# Altium PCB Base_PCB1.PcbDoc (part 1 of 2)
Units mm, origin at the board's own origin, x right, y up, seen from the top; angles counter-clockwise.
Board outline 100 x 100 mm, 4 copper layers (Top, Mid1, Mid2, Bottom), stack 1.746 mm thick; 70 components, 46 nets, 250 pads, 246 vias.
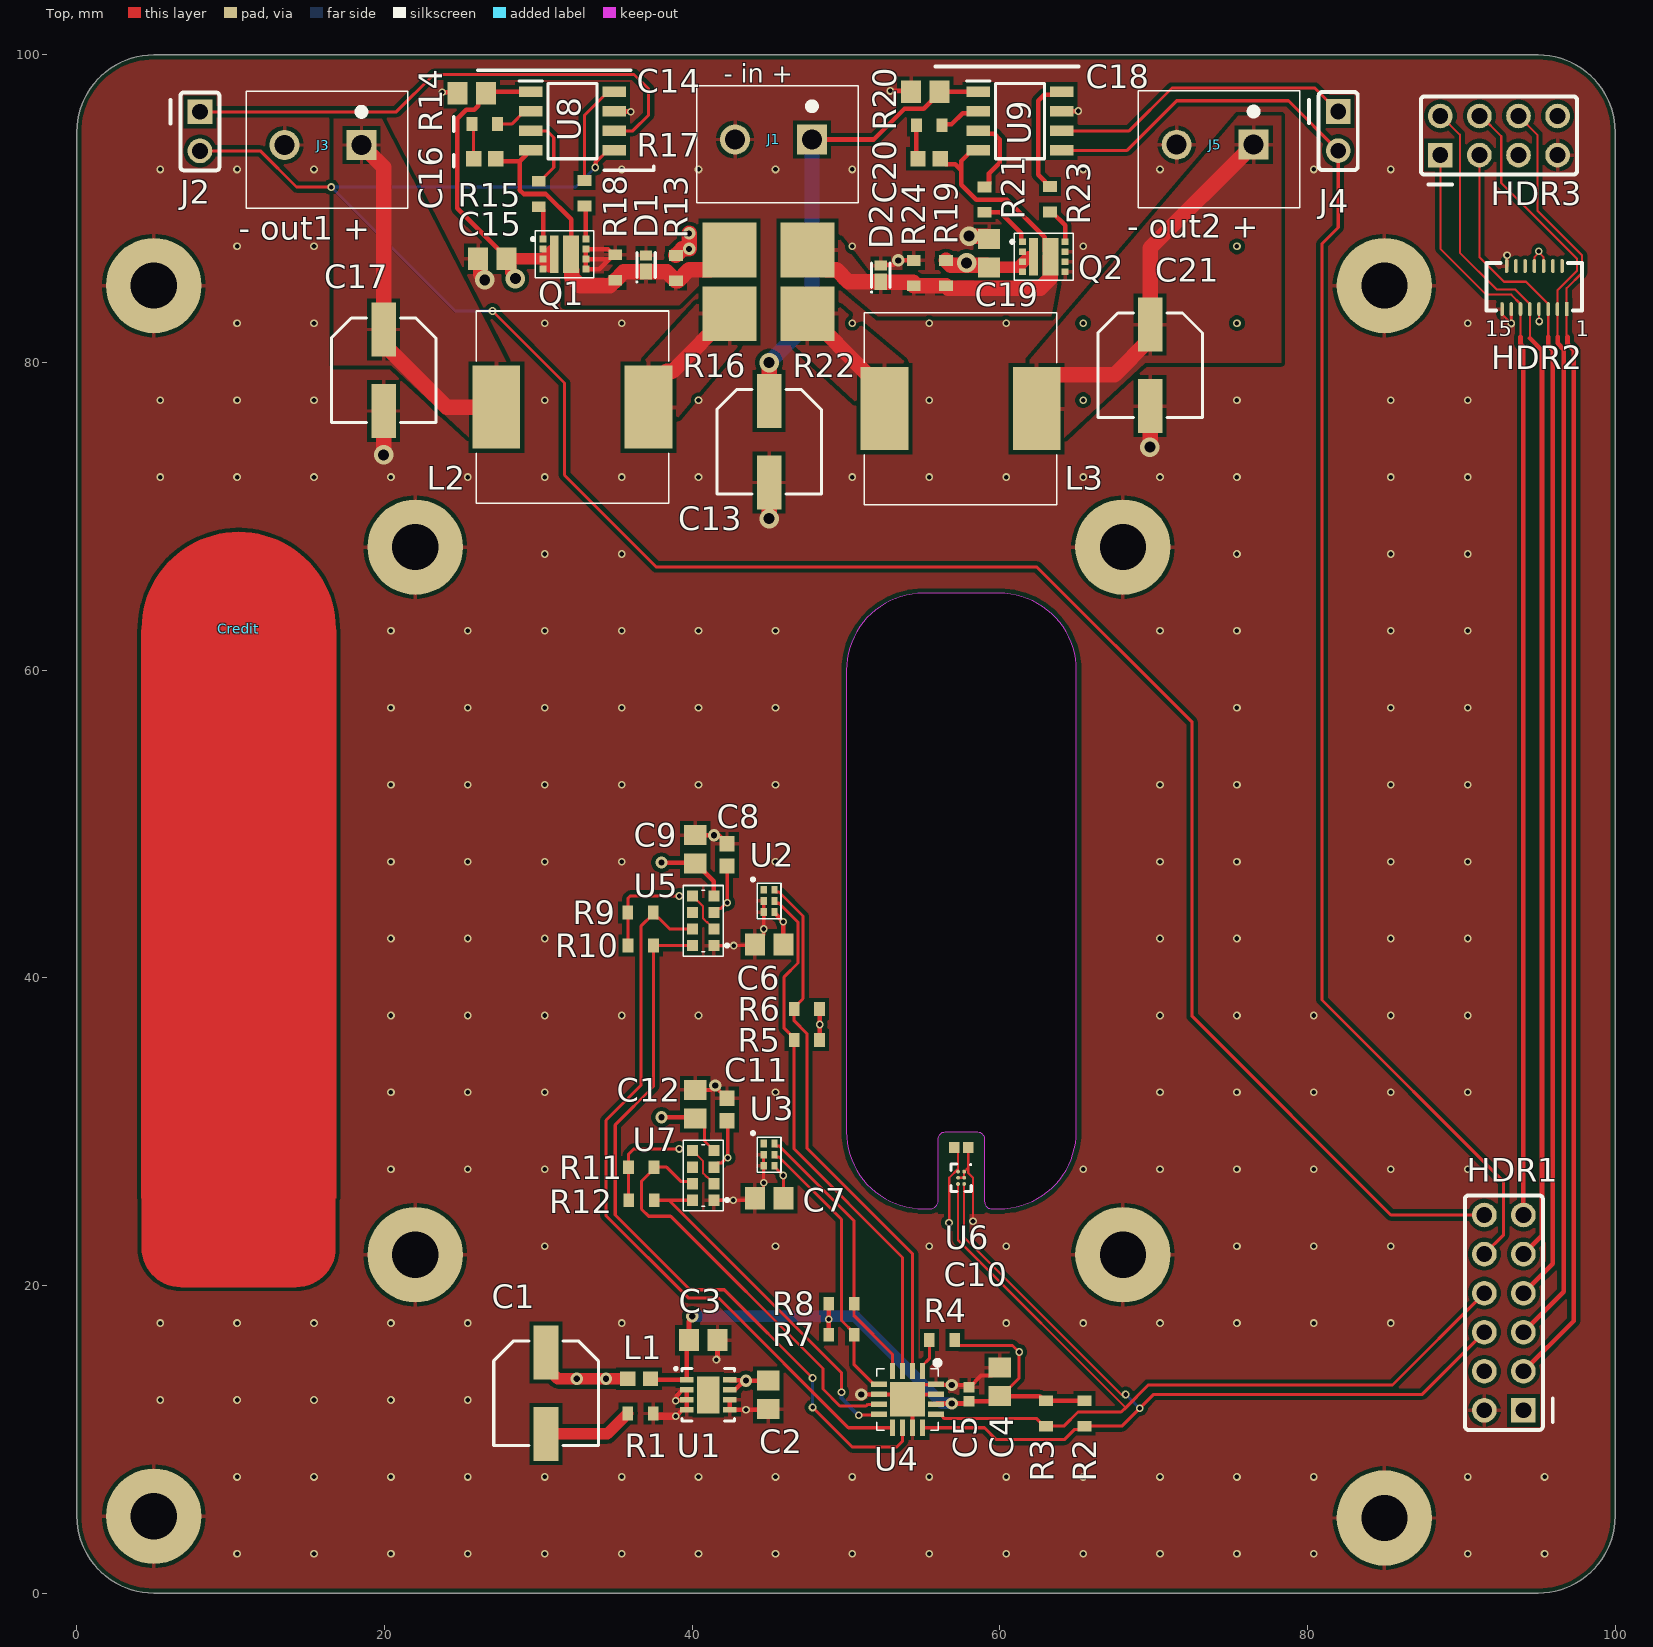
[diagram p0: Top view]
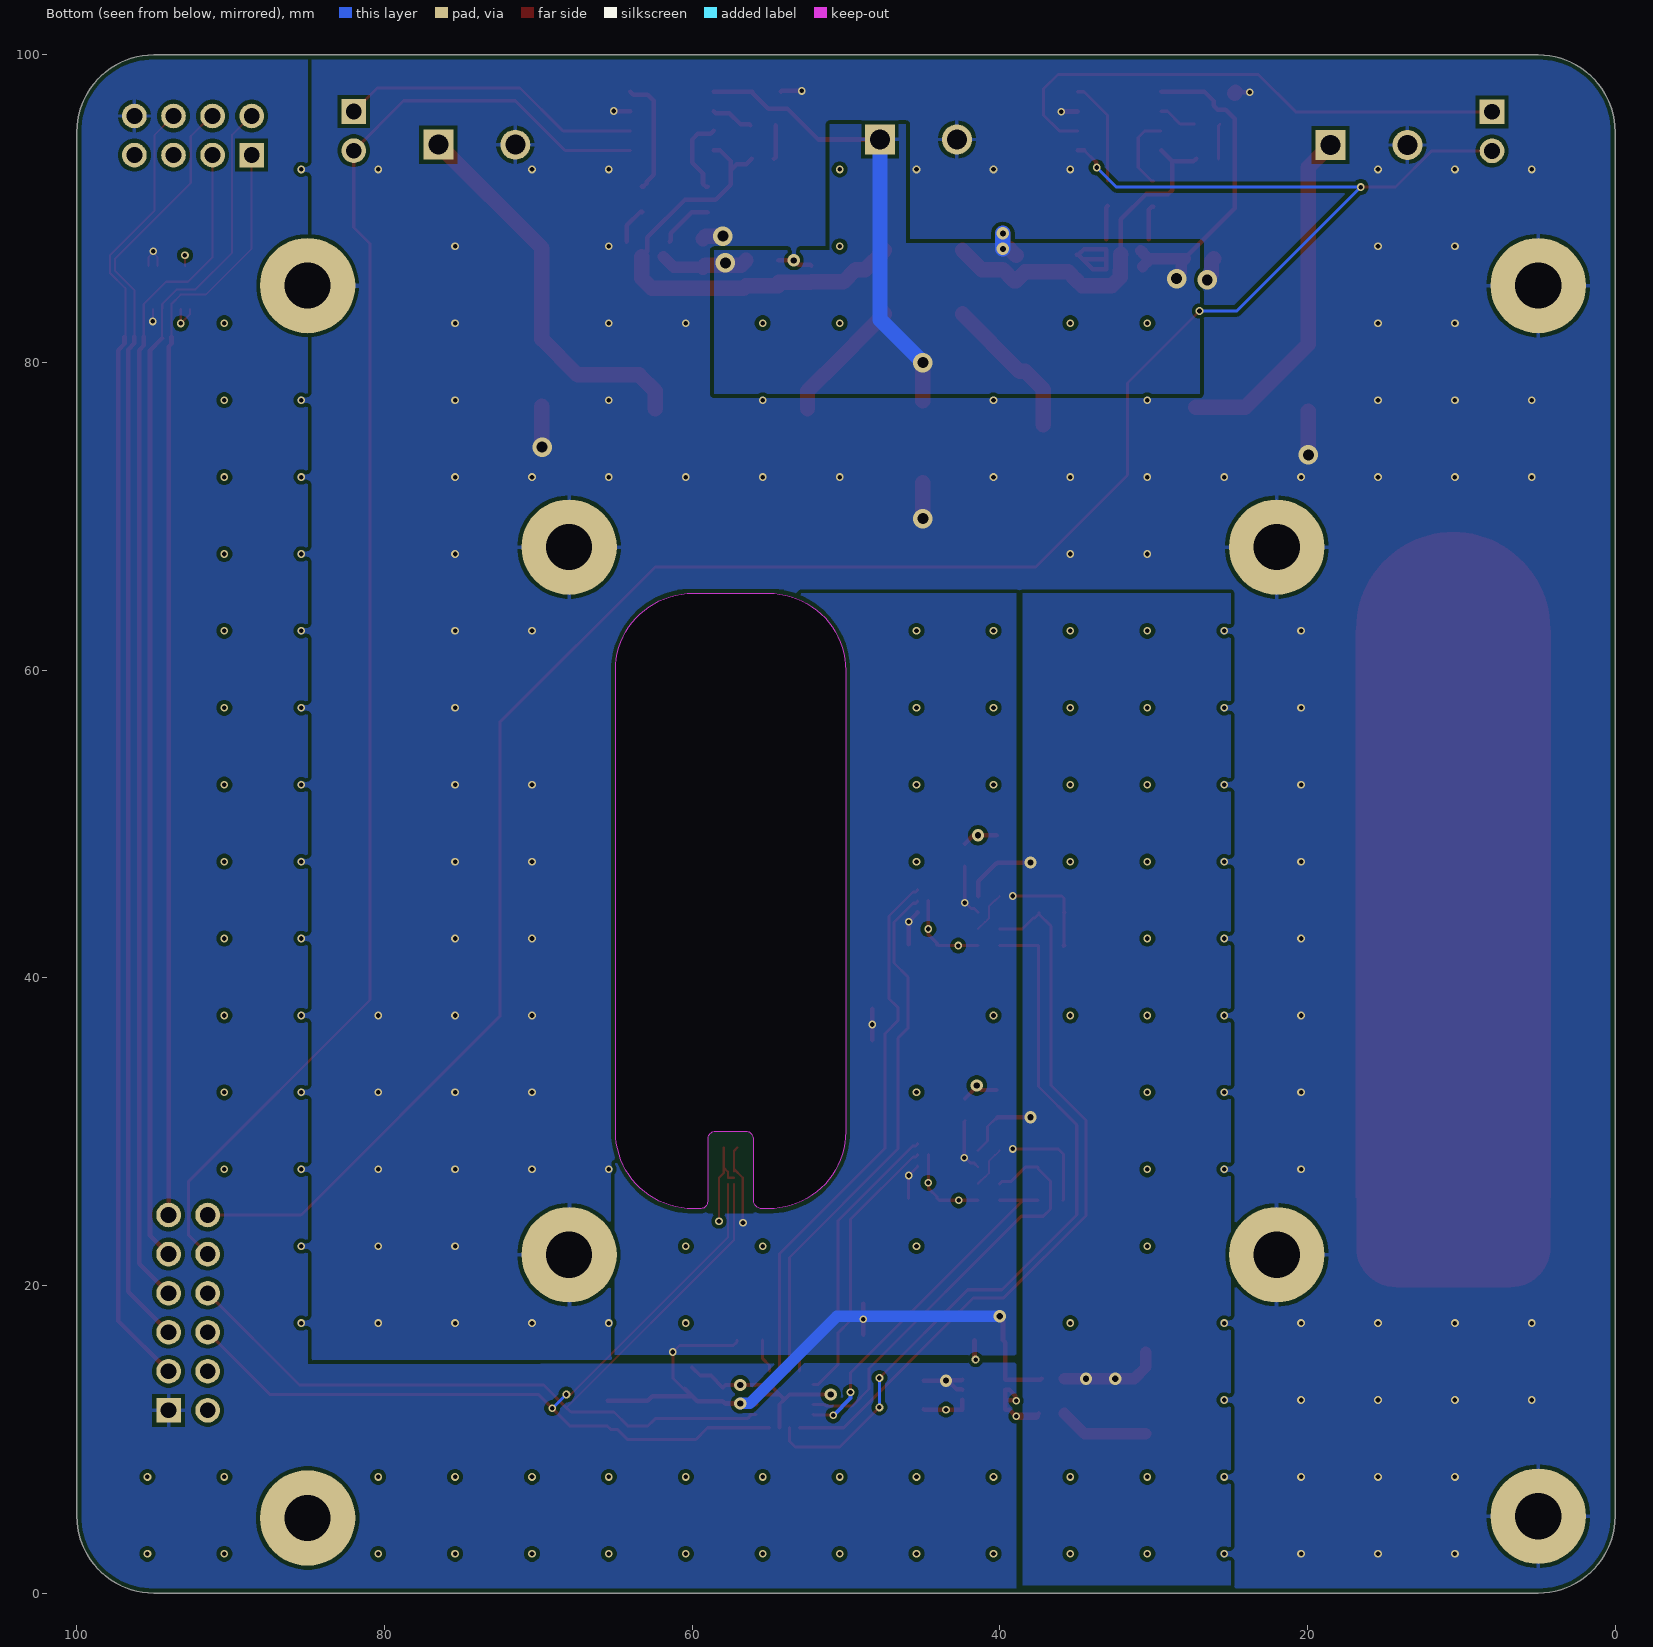
[diagram p1: Bottom view, seen from below]
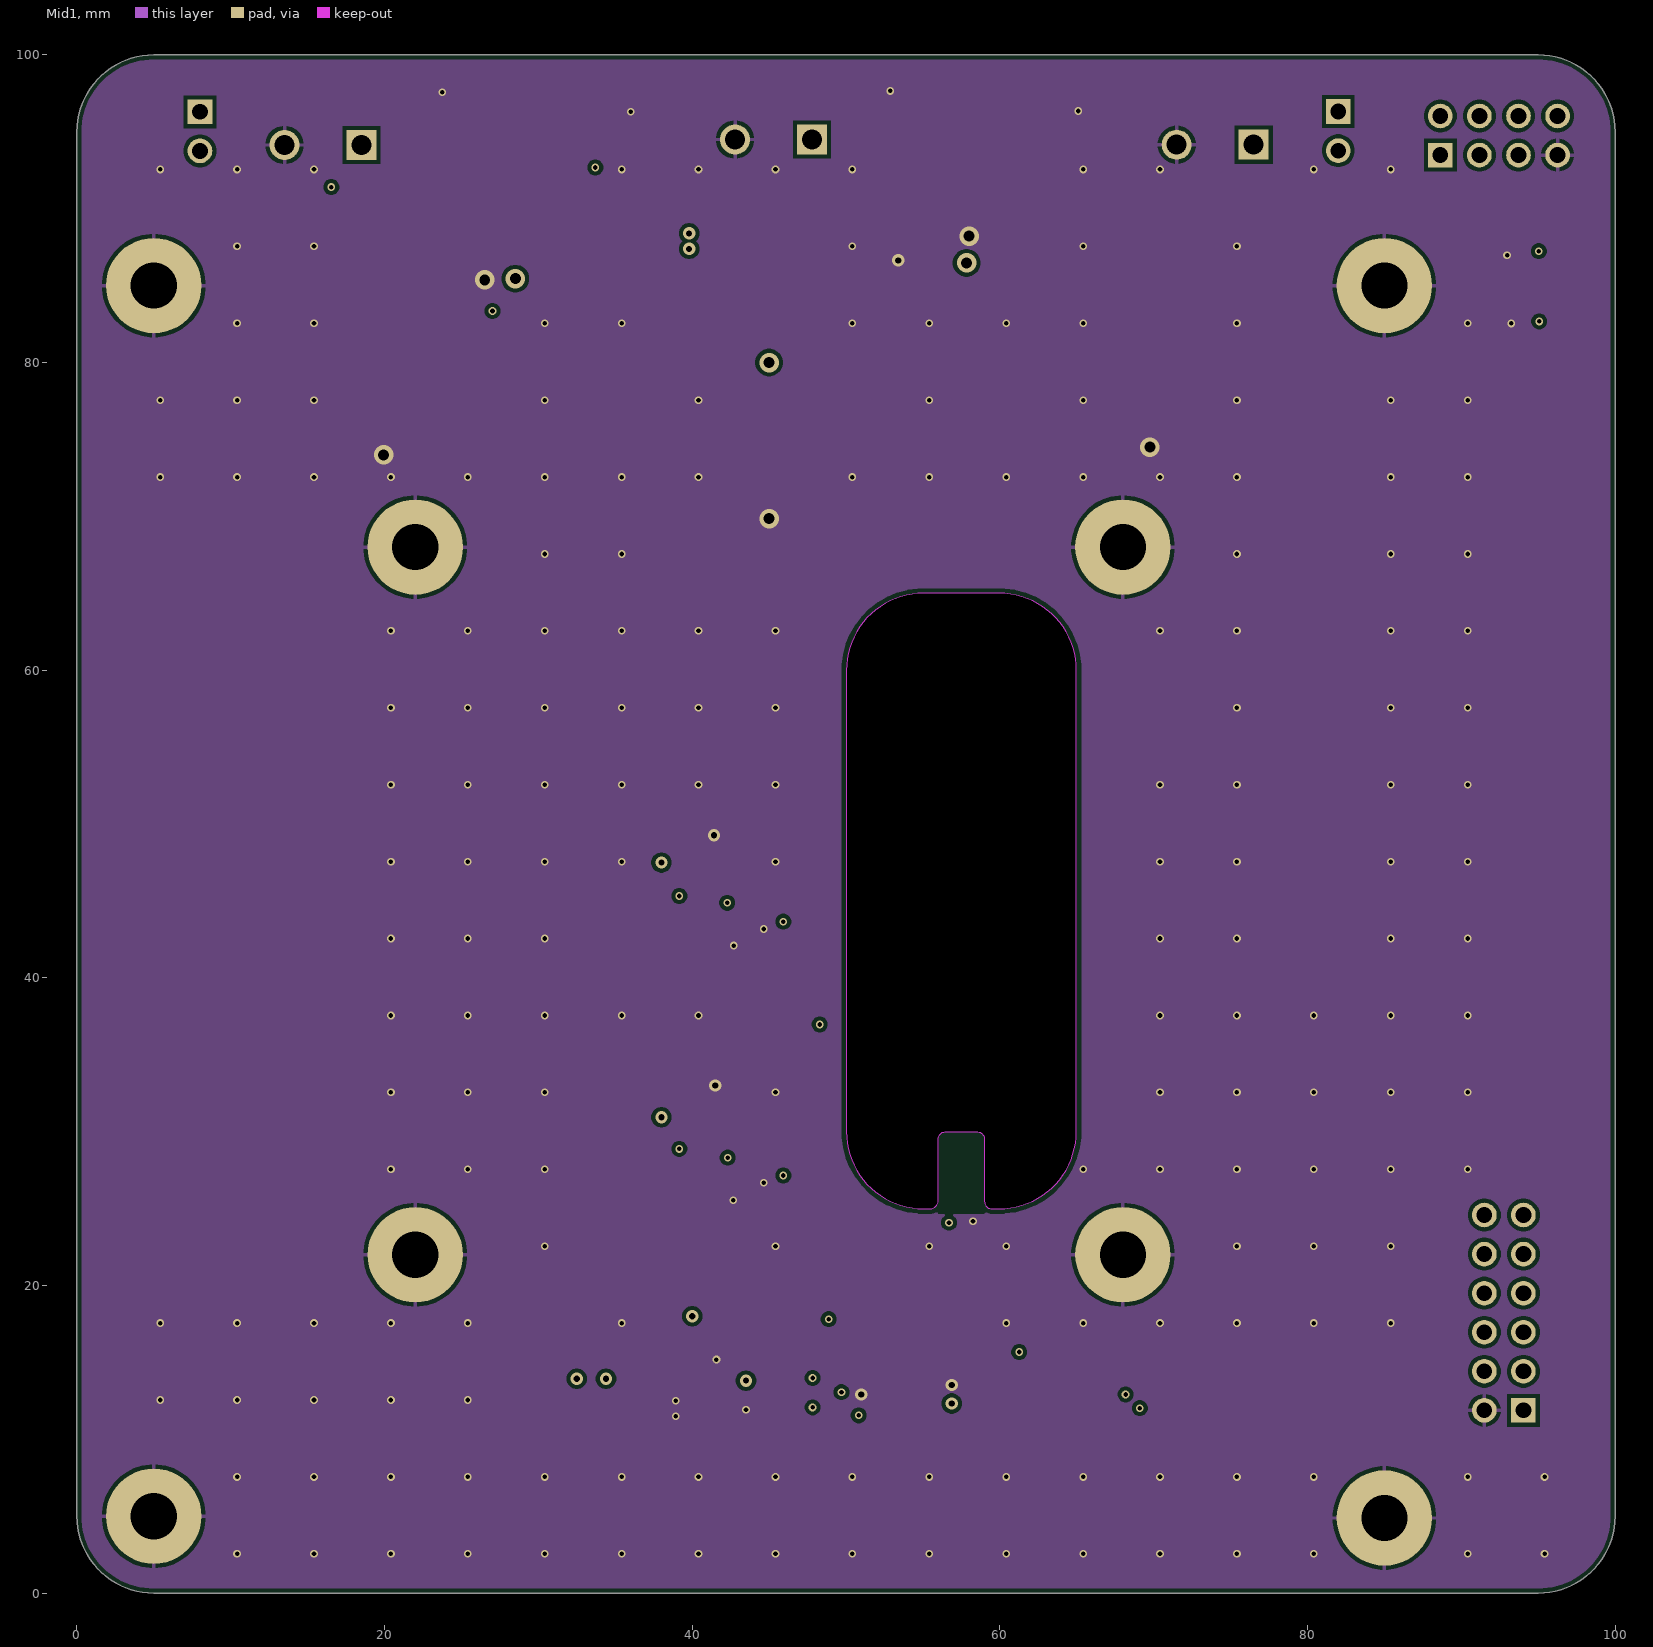
[diagram p2: Mid1]
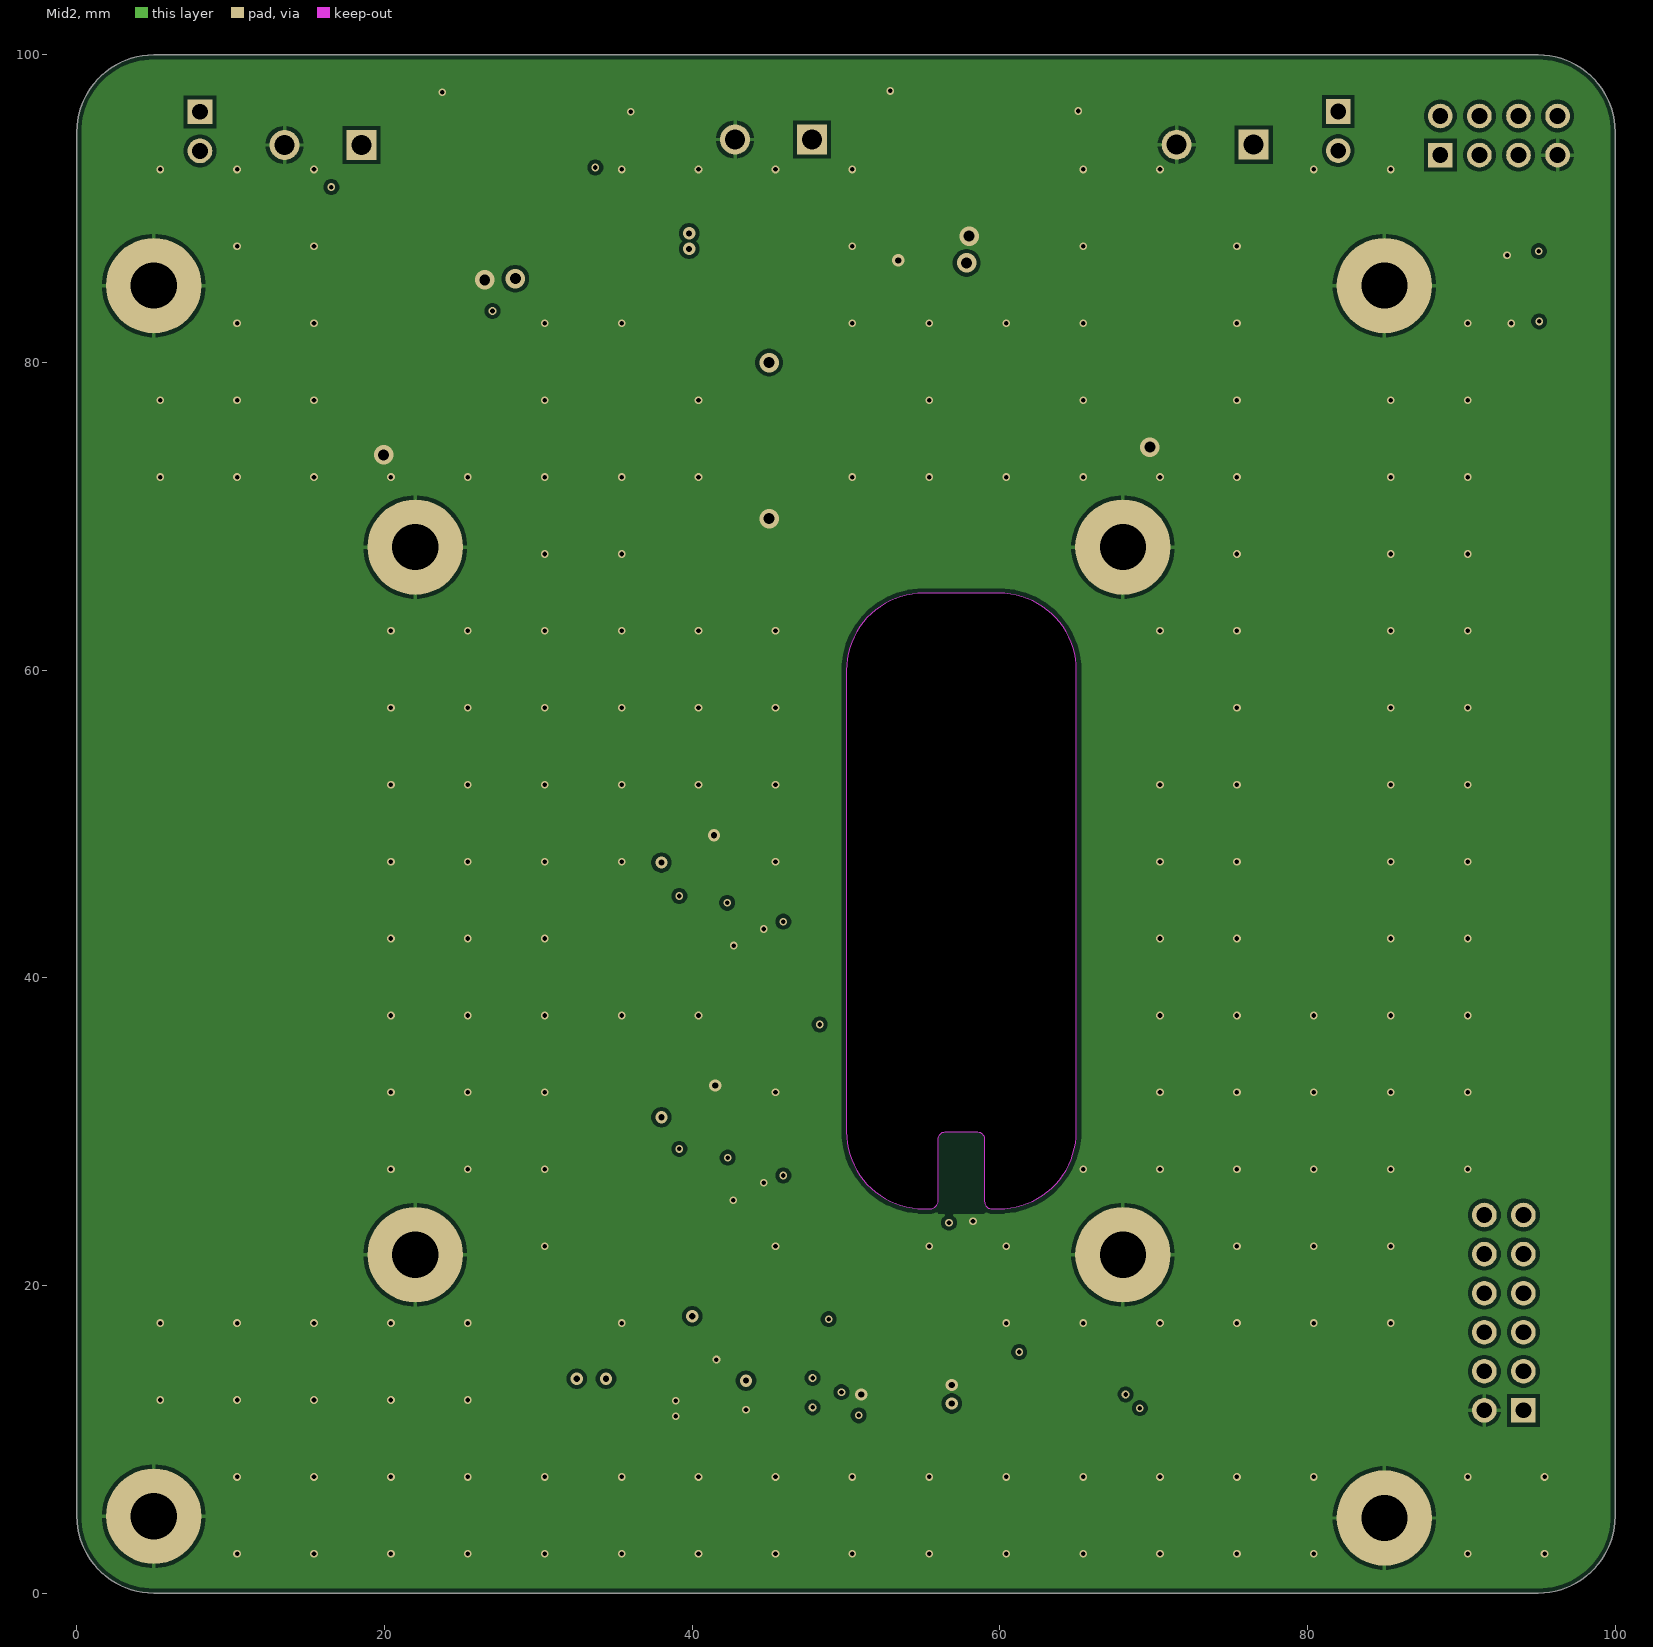
[diagram p3: Mid2]

## Layer stack, top to bottom
Top Solder: solder mask 0.0127, Solder Resist, Dk 3.3
Top: signal copper 0.035
Dielectric 1: prepreg 0.0711, PP-006, Dk 4.1
Mid1: signal copper 0.0178
Dielectric1: core 1.4986, FR-4, Dk 4.3
Mid2: signal copper 0.0178
Dielectric 2: prepreg 0.0711, PP-006, Dk 4.1
Bottom: signal copper 0.035
Bottom Solder: solder mask 0.0127, Solder Resist, Dk 3.3

## Board outline
0,5 0,95 cw(c5,95) 5,100 95,100 cw(c95,95) 100,95 100,5 cw(c95,5) 95,0 5,0 cw(c5,5)
cut-out: 55.04,65 ccw(c55.04,59.984) 50.024,59.984 50.024,30 ccw(c55.04,30) 55.04,24.984 55.477,24.984 ccw(c55.477,25.507) 56,25.507 56,29.5 cw(c56.5,29.5) 56.5,30 58.5,30 cw(c58.5,29.5) 59,29.5 59,25.461 ccw(c59.477,25.461) 59.477,24.984 59.96,24.984 ccw(c59.96,30) 64.976,30 64.984,59.984 ccw(c59.964,59.98) 59.96,65

## Design rules (kind name [scope] priority, off if disabled: settings)
BoardOutlineClearance [All] p1: gap=0.3 ignorepadtopadclearanceinfootprint=FALSE
Clearance "Stitching GND" [IsStitchingVia and InNet('GND') vs (IsVia and (Not IsStitchingVia)) Or IsPad] p1: gap=0.4 ignorepadtopadclearanceinfootprint=FALSE
Clearance [All] p2: gap=0.254 ignorepadtopadclearanceinfootprint=FALSE except(0.127: Arc-Arc Arc-Track Track-Track SMDPad-SMDPad; 0.2: Arc-SMDPad Track-SMDPad; 0.5: THPad-THPad)
DiffPairsRouting [All] p1: maxlimit=0.254 minlimit=0.254 mostfreqgap=0.254 toplayer_minwidth=0.254 toplayer_maxwidth=0.254 toplayer_prefwidth=0.254 midlayer1_minwidth=0.254 midlayer1_maxwidth=0.254 midlayer1_prefwidth=0.254 midlayer2_minwidth=0.254 midlayer2_maxwidth=0.254 midlayer2_prefwidth=0.254 bottomlayer_minwidth=0.254 bottomlayer_maxwidth=0.254 bottomlayer_prefwidth=0.254 maxuncoupledlength=12.7
HoleSize [All] p1: absolutevalues=TRUE maxlimit=7.62 minlimit=0.3 maxpercent=80.000 minpercent=20.000
MinimumAnnularRing [All] p1: minimumring=0.075
MinimumSolderMaskSliver [All] p1: minsoldermaskwidth=0.1
PasteMaskExpansion [All] p1: expansion=0.254 percent=-10.000000
PlaneClearance [All] p1: clearance=0.381
PlaneConnect [All] p1: pad.planeconnectstyle=Relief pad.reliefexpansion=0.508 pad.reliefentries=4 pad.reliefconductorwidth=0.254 pad.reliefairgap=0.254 via.planeconnectstyle=Direct via.reliefexpansion=0.508 via.reliefentries=4 via.reliefconductorwidth=0.254 via.reliefairgap=0.254
PolygonConnect [All] p1: thpad.connectstyle=Relief thpad.reliefconductorwidth=0.254 thpad.reliefentries=4 thpad.polygonreliefangle="90 Angle" thpad.airgapwidth=0.254 smdpad.connectstyle=Relief smdpad.reliefconductorwidth=0.254 smdpad.reliefentries=4 smdpad.polygonreliefangle="90 Angle" smdpad.airgapwidth=0.254 via.connectstyle=Direct via.reliefconductorwidth=0.254 via.reliefentries=4 via.polygonreliefangle="90 Angle" via.airgapwidth=0.254
RoutingVias [All] p1: holewidth=0.2 width=0.5 viastyle="Through Hole" minholewidth=0.2 minwidth=0.4 maxholewidth=5 maxwidth=6
SMDNeckDown [All] p1: percent=100.000
SilkToSilkClearance [All] p1: silktosilkclearance=0.01
SilkToSolderMaskClearance SilkscreenOverComponentPads [IsPad] p1: minsilkscreentomaskgap=0 clearancetoexposedcopper=TRUE
SolderMaskExpansion [All] p1: expansion=0.05 istentingtop=FALSE
Width [All] p1: maxlimit=5 minlimit=0.1 preferedwidth=0.2
22 further rules are at their usual default settings.

## Classes and differential pairs
component class Base_Schematic: C1 C2 C3 C4 C5 C6 C7 C8 C9 C10 C11 C12 Credit HDR1 HDR2 HDR3 L1 R1 R2 R3 R4 R5 R6 R7 R8 R9 R10 R11 R12 U1 U2 U3 U4 U5 U6 U7
component class Base_Buck_Schematic: C13 C14 C15 C16 C17 C18 C19 C20 C21 D1 D2 J1 J2 J3 J4 J5 L2 L3 Q1 Q2 R13 R14 R15 R16 R17 R18 R19 R20 R21 R22 R23 R24 U8 U9

## Components (designator, comment, footprint, x,y, rotation, side; value= is the part's Value field where it differs from the comment)
C1 "47u" CAPAE7366X61N 30.5,13 r270 top
C2 "10uF" CAP_SM0805_YAGEOCC2_N 44.943,12.884 r270 top
C3 "10uF" CAP_SM0805_YAGEOCC2_N 40.717,16.45 r0 top
C4 "1uF" CAP_SM0805_YAGEOCC2_N 60,13.73 r90 top
C5 "10nF" CAP_SM0402_YAGEOCC2_N 58,12.925 r90 top
C6 "1uF" CAP_SM0805_YAGEOCC2_N 45,42.171 r180 top
C7 "1uF" CAP_SM0805_YAGEOCC2_N 45,25.671 r180 top
C8 "100nF" CAP_SM0603_YAGEOCC2_N 42.265,47.993 r90 top
C9 "10uF" CAP_SM0805_YAGEOCC2_N 40.198,48.343 r90 top
C10 "10nF" CAP_SM0402_YAGEOCC2_N 57.5,28.98 r0 top
C11 "100nF" CAP_SM0603_YAGEOCC2_N 42.265,31.435 r90 top
C12 "10uF" CAP_SM0805_YAGEOCC2_N 40.198,31.785 r90 top
C13 "47u" CAPAE7366X61N 45,74.85 r270 top
C14 "1uF" CAP_SM0805_YAGEOCC2_N 25.666,97.504 r180 top
C15 "1uF" CAP_SM0805_YAGEOCC2_N 27.016,86.743 r180 top
C16 "100nF" CAP_SM0603_YAGEOCC2_N 26.516,93.25 r0 top
C17 "47u" CAPAE7366X61N 19.939,79.5 r270 top
C18 "1uF" CAP_SM0805_YAGEOCC2_N 55.156,97.605 r180 top
C19 "1uF" CAP_SM0805_YAGEOCC2_N 59.3,87.113 r90 top
C20 "100nF" CAP_SM0603_YAGEOCC2_N 55.406,93.25 r0 top
C21 "47u" CAPAE7366X61N 69.775,79.819 r270 top
Credit "Credits" CREDITS_CU+TS_SIGNED 10.512,45 r270 top
D1 "PMEG2020EPK" PMEG2020EPK 37,86.442 r90 top
D2 "PMEG2020EPK" PMEG2020EPK 52.262,85.775 r90 top
HDR1 "PinHeader_2x6" PinHeader_2x6_2.54mm 94.04,11.88 r180 top
HDR2 "AYF331535" "AYF331535 _Reverse" 94.75,84.873 r90 top
HDR3 "PinHeader_2x4" PinHeader_2x4_2.54mm 88.639,93.488 r90 top
J1 "Screw Terminal 2 Pin 5mm" TB00250002BE 47.789,94.5 r180 top
J2 "PinHeader_1x2" PinHeader_1x2_2.54mm 8,96.298 r0 top
J3 "Screw Terminal 2 Pin 5mm" TB00250002BE 18.5,94.139 r180 top
J4 "PinHeader_1x2" PinHeader_1x2_2.54mm 82,96.317 r0 top
J5 "Screw Terminal 2 Pin 5mm" TB00250002BE 76.5,94.158 r180 top
L1 "BLM18SP300SN1D" Chip2PinSM127P600-8N 36.55,13.934 r180 top
L2 "PM127SH-330M-RC" PM127SH330MRC 32.214,77.1 r180 top
L3 "PM127SH-330M-RC" PM127SH330MRC 57.45,77 r0 top
Q1 "SIZ342ADT-T1-GE3" SIZ342ADT-T1-GE3 31.7,87.045 r270 top
Q2 "SIZ342ADT-T1-GE3" SIZ342ADT-T1-GE3 62.856,86.875 r270 top
R1 "0" RES_SM0603_YAGEORC_N 36.642,11.678 r180 top
R2 "3K3" RES_SM0603_YAGEORC_N 65.5,11.678 r270 top
R3 "3K3" RES_SM0603_YAGEORC_N 63,11.678 r270 top
R4 "10K" RES_SM0603_YAGEORC_N 56.246,16.45 r180 top
R5 "3K3" RES_SM0603_YAGEORC_N 47.458,35.962 r0 top
R6 "3K3" RES_SM0603_YAGEORC_N 47.458,37.976 r0 top
R7 "3K3" RES_SM0603_YAGEORC_N 49.704,16.8 r180 top
R8 "3K3" RES_SM0603_YAGEORC_N 49.704,18.815 r180 top
R9 "3K3" RES_SM0603_YAGEORC_N 36.637,44.246 r180 top
R10 "3K3" RES_SM0603_YAGEORC_N 36.663,42.096 r180 top
R11 "3K3" RES_SM0603_YAGEORC_N 36.686,27.688 r180 top
R12 "3K3" RES_SM0603_YAGEORC_N 36.709,25.538 r180 top
R13 "DNP" RES_SM0603_YAGEORC_N 38.939,86.14 r90 top value=3K3
R14 "0" RES_SM0603_YAGEORC_N 26.516,95.5 r180 top
R15 "10R" RES_SM0603_YAGEORC_N 30.022,90.957 r270 top
R16 "0R020" MSMA2512R0200FGN 42.429,85.242 r90 top
R17 "10R" RES_SM0603_YAGEORC_N 33,91 r270 top
R18 "DNP" RES_SM0603_YAGEORC_N 35,86.173 r270 top value=3K3
R19 "DNP" RES_SM0603_YAGEORC_N 56.5,85.814 r90 top value=3K3
R20 "0" RES_SM0603_YAGEORC_N 55.406,95.428 r180 top
R21 "10R" RES_SM0603_YAGEORC_N 59,90.593 r270 top
R22 "0R020" MSMA2512R0200FGN 47.5,85.242 r90 top
R23 "10R" RES_SM0603_YAGEORC_N 63.265,90.616 r270 top
R24 "DNP" RES_SM0603_YAGEORC_N 54.406,85.814 r270 top value=3K3
U1 "TPS78433" TPS784xxxQDRBRQ1_SON 41.043,12.891 r0 top
U2 "VCNL36825T" VCNL36825T 45,45 r0 top
U3 "VCNL36825T" VCNL36825T 45,28.5 r0 top
U4 "PCA9546ARGVR" QFN65P400X400X100-17N-D 54,12.6 r270 top
U5 "VCNL4040M3OE" VCNL4040M3OE 40.715,43.708 r0 top
U6 "AS6221" AS6221_BGA_LargePads 57.482,26.999 r270 top
U7 "VCNL4040M3OE" VCNL4040M3OE 40.715,27.15 r0 top
U8 "MIC4605-2YM-TR" SOIC127P600X163-8N 32.223,95.7 r0 top
U9 "MIC4605-2YM-TR" SOIC127P600X163-8N 61.315,95.7 r0 top

## Footprints (in the part's own frame and the unit in brackets; to place one, negate y for a bottom-side part, rotate by r counter-clockwise, add the part's x,y. Pads: shape width x height; smd on the part's side, far side on the other; paste and mask are expansions set on the pad)
AS6221_BGA_LargePads [mm] "BGA, 6-Leads, Body 1.50x1.02mmx0.55mm, Pitch 0.40mm"
  round 0.25 smd paste-0.013: A1(-0.4,0.2) A2(0,0.2) A3(0.4,0.2) B1(-0.4,-0.2) B2(0,-0.2) B3(0.4,-0.2)
  silkscreen extent -0.9,-0.66 0.89,0.67, body extent -0.75,-0.52 0.75,0.52, height 0.55
"AYF331535 _Reverse" [mm]
  rect 0.9x0.23 smd: 1(-1.4,-2.1)
  oval 0.9x0.23 smd: 2(1.4,-1.8) 3(-1.4,-1.5) 4(1.4,-1.2) 5(-1.4,-0.9) 6(1.4,-0.6) 7(-1.4,-0.3) 8(1.4,0) 9(-1.4,0.3) 10(1.4,0.6) 11(-1.4,0.9) 12(1.4,1.2) 13(-1.4,1.5) 14(1.4,1.8) 15(-1.4,2.1)
  silkscreen extent -1.5,-3.1 1.6,3.1, body extent -1.4,-3 1.55,3, height 0.9
CAP_SM0402_YAGEOCC2_N [mm] "Capacitor, Yageo CC Class2, SM0402, IPC Medium Density"
  rect 0.68x0.72 smd: 1(-0.45,0) 2(0.45,0)
  body extent -0.55,-0.35 0.55,0.35, height 0.6
CAP_SM0603_YAGEOCC2_N [mm] "Capacitor, Yageo CC Class2, SM0603, IPC Medium Density"
  rect 1x1 smd: 1(-0.727,0) 2(0.727,0)
  body extent -0.9,-0.5 0.9,0.5, height 0.9
CAP_SM0805_YAGEOCC2_N [mm] "Capacitor, Yageo CC Class2, SM0805, IPC Medium Density"
  rect 1.3x1.45 smd: 1(-0.927,0) 2(0.927,0)
  body extent -1.1,-0.72 1.1,0.72, height 1.45
CAPAE7366X61N [mm] "Aluminum Electrolytic Capacitor, Body 6,60x6,60x6,10mm, IPC Medium Density"
  rect 3.5x1.6 smd: 1(-2.65,0) 2(2.65,0)
  silkscreen extent -3.4,-3.4 3.4,3.4, body extent -3.68,-3.3 3.62,3.3, height 5.8
Chip2PinSM127P600-8N [mm]
  rect 0.99x0.94 smd: 1(-0.735,0) 2(0.735,0)
  body extent -0.85,-0.45 0.85,0.45, height 0.7
CREDITS_CU+TS_SIGNED [mil]
  round 1 smd paste-99999 mask-99999: ""(-696.31,0.36)
  Top region: 895.5,44.01 895.5,50.11 941.28,50.11 941.28,4.33 895.5,4.33 895.5,40.96
  Top region: 941.28,62.32 895.5,62.32 895.5,108.1 941.28,108.1 hole: 935.18,102 901.61,102 901.61,68.42 935.18,68.42 935.18,98.94
  Top region: 941.28,-169.63 895.5,-169.63 895.5,-123.85 941.28,-123.85 hole: 935.18,-129.95 901.61,-129.95 901.61,-163.52 935.18,-163.52
  Top region: 895.5,-84.17 895.5,-65.86 941.28,-65.86 941.28,-111.64 895.5,-111.64 895.5,-87.22
  Top region: 935.18,-7.87 941.28,-7.87 941.28,-53.65 895.5,-53.65 895.5,-7.87 932.12,-7.87
  Top region: 895.5,150.83 895.5,166.09 941.28,166.09 941.28,120.31 895.5,120.31 895.5,147.78
  Top region: 858.88,50.11 883.29,50.11 883.29,4.33 837.51,4.33 837.51,50.11 855.83,50.11
  Top region: 837.51,-111.64 837.51,-65.86 883.29,-65.86 883.29,-111.64 840.57,-111.64
  Top region: 883.29,-169.63 837.51,-169.63 837.51,-123.85 883.29,-123.85 hole: 877.19,-129.95 843.62,-129.95 843.62,-160.47 843.62,-163.52 877.19,-163.52
  Top region: 883.29,126.41 883.29,120.31 837.51,120.31 837.51,166.09 883.29,166.09 883.29,129.46
  Top region: 883.29,-53.65 837.51,-53.65 837.51,-7.87 883.29,-7.87 hole: 877.19,-13.98 843.62,-13.98 843.62,-26.19 843.62,-29.24 843.62,-47.55 877.19,-47.55
  Top region: 883.29,74.53 883.29,71.48 883.29,62.32 837.51,62.32 837.51,108.1 883.29,108.1 hole: 877.19,102 843.62,102 843.62,68.42 877.19,68.42
  Top region: 825.31,95.89 825.31,62.32 779.53,62.32 779.53,108.1 825.31,108.1 825.31,98.94
  Top region: 825.31,-169.63 779.53,-169.63 779.53,-123.85 825.31,-123.85 hole: 819.2,-129.95 785.63,-129.95 785.63,-163.52 819.2,-163.52 819.2,-139.11 819.2,-136.06
  Top region: 825.31,132.52 825.31,120.31 779.53,120.31 779.53,166.09 825.31,166.09 825.31,135.57
  Top region: 810.05,-111.64 779.53,-111.64 779.53,-65.86 825.31,-65.86 825.31,-111.64 813.1,-111.64
  Top region: 785.63,4.33 779.53,4.33 779.53,50.11 825.31,50.11 825.31,4.33 788.68,4.33
  Top region: 825.31,-53.65 779.53,-53.65 779.53,-20.08 779.53,-17.03 779.53,-7.87 825.31,-7.87 hole: 819.2,-13.98 785.63,-13.98 785.63,-26.19 785.63,-29.24 785.63,-47.55 819.2,-47.55
  Top region: 767.32,-111.64 721.54,-111.64 721.54,-84.17 721.54,-81.12 721.54,-65.86 767.32,-65.86 hole: 761.22,-71.96 727.64,-71.96 727.64,-84.17 727.64,-87.22 727.64,-105.54 761.22,-105.54
  Top region: 752.06,-123.85 767.32,-123.85 767.32,-169.63 721.54,-169.63 721.54,-123.85 749.01,-123.85
  Top region: 767.32,4.33 721.54,4.33 721.54,50.11 767.32,50.11 hole: 761.22,44.01 727.64,44.01 727.64,28.75 727.64,25.7 727.64,10.44 761.22,10.44
  Top region: 721.54,98.94 721.54,108.1 767.32,108.1 767.32,62.32 721.54,62.32 721.54,95.89
  Top region: 767.32,120.31 721.54,120.31 721.54,166.09 767.32,166.09 hole: 761.22,159.98 727.64,159.98 727.64,126.41 761.22,126.41
  Top region: 761.22,-53.65 721.54,-53.65 721.54,-7.87 767.32,-7.87 767.32,-53.65 764.27,-53.65
  Top region: 663.55,83.68 663.55,108.1 709.33,108.1 709.33,62.32 663.55,62.32 663.55,80.63
  Top region: 709.33,-142.16 709.33,-169.63 663.55,-169.63 663.55,-123.85 709.33,-123.85 709.33,-139.11
  Top region: 663.55,-17.03 663.55,-7.87 709.33,-7.87 709.33,-53.65 663.55,-53.65 663.55,-20.08
  Top region: 709.33,-68.91 709.33,-111.64 663.55,-111.64 663.55,-65.86 709.33,-65.86 hole: 703.23,-71.96 669.66,-71.96 669.66,-96.38 669.66,-99.43 669.66,-105.54 703.23,-105.54
  Top region: 709.33,120.31 663.55,120.31 663.55,166.09 709.33,166.09 hole: 703.23,159.98 669.66,159.98 669.66,126.41 703.23,126.41
  Top region: 709.33,4.33 663.55,4.33 663.55,50.11 709.33,50.11 hole: 703.23,44.01 669.66,44.01 669.66,10.44 703.23,10.44
  Top region: 605.57,31.8 605.57,50.11 651.35,50.11 651.35,4.33 605.57,4.33 605.57,28.75
  Top region: 651.35,98.94 651.35,62.32 605.57,62.32 605.57,108.1 651.35,108.1 651.35,102
  Top region: 629.98,-7.87 651.35,-7.87 651.35,-53.65 605.57,-53.65 605.57,-7.87 626.93,-7.87
  Top region: 605.57,-163.52 605.57,-123.85 651.35,-123.85 651.35,-169.63 605.57,-169.63 605.57,-166.58
  Top region: 651.35,120.31 605.57,120.31 605.57,166.09 651.35,166.09 hole: 645.24,159.98 611.67,159.98 611.67,144.72 611.67,141.67 611.67,126.41 645.24,126.41
  Top region: 639.14,-111.64 605.57,-111.64 605.57,-65.86 651.35,-65.86 651.35,-111.64 642.19,-111.64
  Top region: 550.63,62.32 547.58,62.32 547.58,108.1 593.36,108.1 593.36,62.32 553.68,62.32
  Top region: 593.36,22.65 593.36,4.33 547.58,4.33 547.58,50.11 593.36,50.11 593.36,25.7
  Top region: 578.1,166.09 593.36,166.09 593.36,120.31 547.58,120.31 547.58,166.09 575.05,166.09
  Top region: 590.31,-111.64 547.58,-111.64 547.58,-65.86 593.36,-65.86 593.36,-111.64
  Top region: 593.36,-47.55 593.36,-53.65 547.58,-53.65 547.58,-7.87 593.36,-7.87 593.36,-44.5
  Top region: 593.36,-169.63 547.58,-169.63 547.58,-123.85 593.36,-123.85 hole: 587.26,-129.95 553.68,-129.95 553.68,-163.52 587.26,-163.52 587.26,-154.37 587.26,-151.32
  Top region: -584.97,14.93 -583.55,13.51 -584.12,11.25 -586.1,9.27 -588.93,7.57 -589.22,5.59 -588.65,3.89 -589.22,-2.9 -591.48,-6.87 -592.33,-7.72 -595.16,-8.85 -597.43,-9.42 -604.79,-9.98 -623.47,-9.42 -625.17,-8.85 -629.98,-8 -632.81,-7.43 -635.64,-6.3 -638.76,-5.45 -643,-5.17 -643.29,-3.75 -641.87,-1.77 -639.89,0.21 -638.76,0.78 -636.49,3.04 -635.36,3.61 -634.23,4.74 -622.34,10.4 -620.07,10.97 -615.83,12.38 -615.54,12.66 -608.75,13.8 -606.48,14.36 -599.12,14.93 -596.86,15.5 hole: -608.18,9.83 -609.88,9.27 -611.01,8.7 -611.86,7.85 -612.43,5.59 -611.86,-2.34 -610.45,-5.45 -608.47,-5.74 -603.37,-5.17 -602.24,-4.04 -603.65,-0.36 -603.94,0.49 -603.94,1.06 -604.22,4.17 -603.94,9.55 hole: -619.51,7 -619.79,6.72 -620.07,6.44 -623.75,5.02 -633.66,-0.36 -633.94,-1.77 -633.1,-2.62 -630.83,-3.19 -627.72,-4.04 -624.89,-4.6 -620.36,-5.17 -617.24,-5.45 -615.83,-4.6 -616.39,2.76 -616.96,5.02 -617.53,6.72
  Top region: -633.09,115.14 -633.94,117.69 -633.38,120.52 -631.96,121.94 -629.7,122.5 -627.43,121.94 -626.02,120.52 -625.17,117.41 -626.02,115.43 -626.87,114.58 -629.7,113.44 -632.53,114.58 -632.81,114.86
  Top region: -643.85,106.65 -642.15,108.35 -639.32,107.78 -638.47,106.93 -637.91,105.8 -637.34,104.1 -637.91,102.4 -638.76,100.99 -641.02,100.42 -643.29,100.99 -645.27,102.97 -644.7,105.8 -644.14,106.37
  Top region: -655.74,90.23 -654.33,92.21 -650.65,92.5 -649.23,91.08 -649.8,87.12 -651.21,85.7 -654.04,86.27 -655.46,87.68 -656.02,89.95
  Top region: -717.45,-101.14 -712.36,-105.1 -711.51,-105.95 -709.81,-109.91 -710.38,-117.27 -712.64,-121.24 -713.49,-122.08 -714.62,-122.65 -715.76,-123.78 -718.59,-124.92 -723.4,-125.2 -726.23,-124.63 -729.34,-122.65 -733.02,-118.97 -733.87,-115.86 -734.16,-109.91 -731.33,-104.82 -729.34,-102.83 -728.5,-102.55 -728.21,-102.27 -724.25,-100.57 hole: -720.29,-105.1 -724.81,-105.67 -725.38,-105.67 -728.5,-108.21 -729.63,-111.04 -730.19,-113.31 -728.78,-116.99 -727.93,-117.84 -727.36,-118.97 -724.25,-120.39 -721.98,-120.95 -718.87,-120.1 -716.89,-118.69 -714.91,-116.71 -714.34,-114.44 -713.77,-112.74 -714.91,-109.35 -717.45,-106.23
  Top region: 407 vertices and 73 holes, not listed, extent -939.68,-244.38 -529.77,244.8
  Top region: -783.13,125.33 -784.55,126.75 -785.11,129.01 -784.55,132.41 -781.43,133.83 -778.6,133.26 -777.19,131.84 -777.75,126.75 -779.17,125.33 -782.56,125.33
  Top region: 761.22,250 761.22,-249.02 -693.39,-249.02 -693.39,250
  Top region: 7.87,248.03 888.19,248.03 926.46,240.42 958.9,218.74 980.58,186.3 988.19,148.03 988.19,148.03 988.19,-148.03 980.58,-186.3 958.9,-218.74 926.46,-240.42 888.19,-248.03 888.19,-248.03 11.81,-248.03
  Top region: -696.31,-247.67 -791.23,-228.79 -871.7,-175.02 -925.47,-94.55 -944.35,0.36 -944.35,0.36 -925.47,95.28 -871.7,175.75 -791.23,229.51 -696.31,248.39 -696.31,248.39 -601.4,229.51 -520.93,175.75 -467.16,95.28 -448.28,0.36 -448.28,0.36 -467.16,-94.55 -520.93,-175.02 -601.4,-228.79 -696.31,-247.67
MSMA2512R0200FGN [mm]
  rect 3.55x3.5 smd: 1(-2.075,0) 2(2.075,0)
  body extent -3.3,-1.7 3.3,1.7, height 0.62
PinHeader_1x2_2.54mm [mm]
  rect 1.6x1.6 hole 1.02: 1(0,0)
  round 1.6 hole 1.02: 2(0,-2.54)
  silkscreen extent -1.91,-3.81 1.27,1.27
PinHeader_2x4_2.54mm [mm]
  rect 1.6x1.6 hole 1.02: 1(0,0)
  round 1.6 hole 1.02: 2(0,-2.54) 3(0,-5.08) 4(0,-7.62) 5(2.54,-7.62) 6(2.54,-5.08) 7(2.54,-2.54) 8(2.54,0)
  silkscreen extent -1.91,-8.89 3.81,1.27
PinHeader_2x6_2.54mm [mm]
  rect 1.6x1.6 hole 1.02: 1(0,0)
  round 1.6 hole 1.02: 2(0,-2.54) 3(0,-5.08) 4(0,-7.62) 5(0,-10.16) 6(0,-12.7) 7(2.54,-12.7) 8(2.54,-10.16) 9(2.54,-7.62) 10(2.54,-5.08) 11(2.54,-2.54) 12(2.54,0)
  silkscreen extent -1.91,-13.97 3.81,1.27
PM127SH330MRC [mm]
  rect 3.1x5.4 smd: 1(-4.95,0) 2(4.95,0)
  silkscreen extent -6.25,-6.25 6.25,6.25, body extent -6.25,-6.25 6.25,6.25, height 8.1
PMEG2020EPK [mm] "SS34FA Molded Diode, 2-Leads, Body 2,80x1,80mm, IPC Medium Density"
  rect 1.05x0.8 smd: 1(-0.525,0)
  rect 0.65x0.8 smd: 2(0.525,0)
  silkscreen extent -1.25,-0.6 0.7,0.65, body extent -0.9,-0.4 0.7,0.4, height 0.4
QFN65P400X400X100-17N-D [mm]
  rect 1.05x0.35 smd: 1(-1.85,0.975) 2(-1.85,0.325) 3(-1.85,-0.325) 4(-1.85,-0.975) 9(1.85,-0.975) 10(1.85,-0.325) 11(1.85,0.325) 12(1.85,0.975)
  rect 0.35x1.05 smd: 5(-0.975,-1.85) 6(-0.325,-1.85) 7(0.325,-1.85) 8(0.975,-1.85) 13(0.975,1.85) 14(0.325,1.85) 15(-0.325,1.85) 16(-0.975,1.85)
  rect 2.26x2.26 smd: 17(0,0)
  silkscreen extent -2.54,-2 2,2.11, body extent -1.99,-2.06 2.01,1.94, height 1
RES_SM0603_YAGEORC_N [mm] "Resistor, Yageo RC_L, SM0603, IPC Medium Density"
  rect 0.7x0.9 smd: 1(-0.827,0) 2(0.827,0)
  body extent -0.85,-0.45 0.85,0.45, height 0.55
SIZ342ADT-T1-GE3 [mm]
  rect 0.45x0.45 smd: 1(-0.975,-1.386) 2(-0.325,-1.386) 3(0.325,-1.386) 4(0.975,-1.386) 5(0.975,1.386) 6(0.325,1.386) 7(-0.325,1.386) 8(-0.975,1.386)
  rect 2.45x1.036 smd: 9(0,0.434)
  rect 2.45x0.562 smd: 10(0,-0.671)
  silkscreen extent -1.52,-2.15 1.52,1.91, body extent -1.49,-1.56 1.51,1.57, height 0.9
SOIC127P600X163-8N [mm]
  rect 1.525x0.7 smd: 1(-2.712,1.905) 2(-2.712,0.635) 3(-2.712,-0.635) 4(-2.712,-1.905) 5(2.712,-1.905) 6(2.712,-0.635) 7(2.712,0.635) 8(2.712,1.905)
  silkscreen extent -3.47,-2.45 1.6,2.61, body extent -3,-2.45 3,2.45, height 1.63
TB00250002BE [mm]
  rect 1.95x1.95 hole 1.3: 1(0,0)
  round 1.95 hole 1.3: 2(5,0)
  silkscreen extent -3,-3.5 7.5,4.1, body extent -2.96,-3.54 7.54,4.06, height 10
TPS784xxxQDRBRQ1_SON [mm] "SON127P600-8N"
  rect 0.9x0.35 smd: 1(-1.395,0.975) 2(-1.395,0.325) 3(-1.395,-0.325) 4(-1.395,-0.975) 5(1.395,-0.975) 6(1.395,-0.325) 7(1.395,0.325) 8(1.395,0.975)
  rect 1.49x2.4 smd: 9(0,0)
  silkscreen extent -2.15,-1.7 1.7,1.75, body extent -1.55,-1.55 1.55,1.55, height 1
VCNL4040M3OE [mm]
  rect 0.7x0.725 smd: 1(0.7,-1.612) 2(0.7,-0.537) 3(0.7,0.538) 4(0.7,1.613) 5(-0.7,1.613) 6(-0.7,0.538) 7(-0.7,-0.537) 8(-0.7,-1.612)
  silkscreen extent -1.3,-2.29 1.65,2.3, body extent -1,-2 1,2, height 1.25
VCNL36825T [mm]
  rect 0.4x0.5 smd: 1(-0.35,0.725) 2(-0.35,0) 3(-0.35,-0.725) 4(0.35,-0.725) 5(0.35,0) 6(0.35,0.725)
  silkscreen extent -1.15,-1.15 0.77,1.5, body extent -0.63,-1 0.63,1, height 0.7

## Part data
C1 C13 C17 C21: library part EEE-FK1E470P, "Aluminium Electrolytic Capacitors - SMD 47uF 25V", Supplier Part Number 1=667-EEE-FK1E470P, Supplier 1=Mouser, Supplier 2=Digi-Key, Supplier 3=Digi-Key, Supplier Part Number 2=PCE3804CT-ND, Supplier Part Number 3=PCE3804DKR-ND
C2 C3 C9 C12: library part CC0805KKX5R8BB106, "CAP 10uF SM0805 X5R 16V YAGEO CC2", Manufacturer=Yageo, Manufacturer Part Number=CC0805KKX7R8BB225, Package=0805, Supplier Part Number 1=1988078, Tolerance (%)=10, Voltage Rating (Volts)=25, Category=Capacitor, ComponentLink1Description="Manufacturer Website", ComponentLink1URL=http://www.yageo.com, Supplier 1=Rs, Supplier 2=Digikey, Supplier 3=Digikey, Supplier 4=Farnell, Supplier 5=Mouser, Supplier Part Number 2=311-1869-1-ND, Supplier Part Number 3=311-1869-6-ND, Supplier Part Number 4=3369293, Supplier Part Number 5=603-CC805KKX5R8BB106
C4 C6 C7 C14 C15 C18 C19: library part CC0805KKX7R8BB105, "CAP 1uF SM0805 X7R 25V YAGEO CC2", Manufacturer=Yageo, Package=0805, Supplier Part Number 1=1458903, Tolerance (%)=10, Voltage Rating (Volts)=25, Category=Capacitor, ComponentLink1Description="Manufacturer Website", ComponentLink1URL=http://www.yageo.com, Manufacturer Part Number=CC0805KKX7R8BB105, Supplier 1=Farnell, Supplier 2=Digikey, Supplier 3=Mouser, Supplier 4="Future Electronics", Supplier 5="Arrow Electronics", Supplier 6=Rs, Supplier 7=Digikey, Supplier Part Number 2=311-1456-1-ND, Supplier Part Number 3=603-CC805KKX7R8BB105, Supplier Part Number 4=7716954, Supplier Part Number 5=CC0805KKX7R8BB105, Supplier Part Number 6=1988104, Supplier Part Number 7=311-1456-6-ND
C5 C10: library part CC0402KRX7R9BB103, "CAP 10nF SM0402 X7R 50V YAGEO CC2", Manufacturer=Yageo, Manufacturer Part Number=CC0603KRX7R9BB103, Package=0603, Supplier Part Number 1=3369167, Tolerance (%)=10, Voltage Rating (Volts)=50, Category=Capacitor, ComponentLink1Description="Manufacturer Website", ComponentLink1URL=http://www.yageo.com, Supplier 1=Farnell, Supplier 2=Mouser, Supplier 3=DigiKey, Supplier Part Number 2=603-CC402KRX7R9BB103, Supplier Part Number 3=311-1349-1-ND
C8 C11 C16 C20: library part CC0603KRX7R9BB104, "CAP 100nF SM0603 X7R 50V YAGEO CC2", Manufacturer=Yageo, Package=0603, Supplier Part Number 1=603-CC603KRX7R9BB104, Tolerance (%)=10, Voltage Rating (Volts)=50, Category=Capacitor, ComponentLink1Description="Manufacturer Website", ComponentLink1URL=http://www.yageo.com, Manufacturer Part Number=CC0603KRX7R9BB104, Supplier 1=Mouser, Supplier 2="Future Electronics", Supplier 3="Future Electronics", Supplier 4="Arrow Electronics", Supplier 5=Rs, Supplier 6=Avnet, Supplier 7=Digikey, Supplier 8=Digikey, Supplier Part Number 2=3035896, Supplier Part Number 3=9017302, Supplier Part Number 4=CC0603KRX7R9BB104, Supplier Part Number 5=6698767, Supplier Part Number 6=68R4788, Supplier Part Number 7=311-1344-1-ND, Supplier Part Number 8=311-1344-6-ND
D1 D2: "PMEG2020EPK 20 V, 2 A low VF MEGA Schottky barrier rectifier", Supplier Part Number 1=1727-1338-1-ND, Supplier 1=Digikey, Supplier 2=Digikey, Supplier 3=Farnell, Supplier 4=Mouser, Supplier 5=LCSC, Supplier Part Number 2=1727-1338-6-ND, Supplier Part Number 3=2191802, Supplier Part Number 4=771-PMEG2020EPK,315, Supplier Part Number 5=C552841
HDR1: library part PinHeader_2x6_2.54mm, "PinHeader_2x6 2.54mm Pitch"
HDR2: "AYF331535 FFC & FPC-Steckverbinder CONNECTOR SURFACE MOUNT", Supplier Part Number 1=769-AYF331535, Supplier 1=Mouser, Supplier 2=Digi-Key, Supplier Part Number 2=255-3053-1-ND
HDR3: library part PinHeader_2x4_2.54mm, "PinHeader_2x4 2.54mm Pitch"
J1 J3 J5: library part TB00250002BE, "Fixed Terminal Blocks Terminal block, screw type, 5.00, horizontal, 2 poles, CUI Blue, slotted screw, PCB mount"
J2 J4: library part PinHeader_1x2_2.54mm, "PinHeader_1x2 2.54mm Pitch"
L1: "Ferrite Beads 0603 30ohm 10% 6A", Manufacturer_Name="Murata Electronics", Mouser Part Number=81-BLM18SP300SN1D, Supplier Part Number 1=490-BLM18SP300SN1DCT-ND, Datasheet Link=http://www.murata.com/~/media/webrenewal/support/library/catalog/products/emc/emifil/c31e.ashx?la=en-gb, Geometry.Height=0.95mm, Manufacturer_Part_Number=BLM18SP300SN1D, Mouser Price/Stock=https://www.mouser.co.uk/ProductDetail/Murata-Electronics/BLM18SP300SN1D?qs=W%2FMpXkg%252BdQ4o%252BOP%252B6m8FYA%3D%3D, Supplier 1=Digi-Key, Supplier 2=Digi-Key, Supplier 3=Mouser, Supplier Part Number 2=490-BLM18SP300SN1DDKR-ND, Supplier Part Number 3=81-BLM18SP300SN1D
L2 L3: "Bourns PM127SH Series Shielded Wire-wound SMD Inductor with a Ferrite Core, 33 uH +/-20% Wire-Wound 3.5A Idc Q:28", Manufacturer_Name=Bourns, Mouser Part Number=542-PM127SH-330M-RC, Supplier Part Number 1=PM127SH-330M-RCCT-ND, Datasheet Link=https://www.bourns.com/docs/Product-Datasheets/pm127sh_series.pdf, Geometry.Height=8mm, Manufacturer_Part_Number=PM127SH-330M-RC, Mouser Price/Stock=https://www.mouser.co.uk/ProductDetail/Bourns/PM127SH-330M-RC?qs=eR5JJ6cMb%252Bbm7NbWn3468w%3D%3D, Supplier 1=Digi-Key, Supplier 2=Digi-Key, Supplier 3=Mouser, Supplier Part Number 2=PM127SH-330M-RCDKR-ND, Supplier Part Number 3=542-PM127SH-330M-RC
Q1 Q2: "MOSFET 30V Vds 20V Vgs PowerPAIR 3 x 3", Manufacturer_Name="Vishay Semiconductors", Mouser Part Number=78-SIZ342ADT-T1-GE3, Datasheet Link=https://www.vishay.com/doc?76711, Geometry.Height=0.8mm, Manufacturer_Part_Number=SIZ342ADT-T1-GE3, Supplier 1=Mouser, Supplier Part Number 1=78-SIZ342ADT-T1-GE3
R1 R14 R20: library part RC0603FR-070RL, "RES 0R SM0603 YAGEO RC_L", Manufacturer=Yageo, Manufacturer Part Number=RC0603FR-0710KL, Package=0603, Power (Watts)=0.1, Resistance (Ohms)=10000, Supplier Part Number 1=311-0.0HRCT-ND, Tolerance (%)=1, Category=Resistor, ComponentLink1Description="Manufacturer Website", ComponentLink1URL=http://www.yageo.com, Supplier 1=Digikey, Supplier 2=Digikey, Supplier 3=Farnell, Supplier 4=Mouser, Supplier 5=Newark, Supplier Part Number 2=311-0.0HRDKR-ND, Supplier Part Number 3=2309106, Supplier Part Number 4=603-RC0603FR-070RL, Supplier Part Number 5=50Y7761
R2 R3 R5 R6 R7 R8 R9 R10 R11 R12 R13 R18 R19 R24: library part RC0603FR-073K3L, "RES 3K3 SM0603 YAGEO RC_L", Manufacturer=Yageo, Manufacturer Part Number=RC0603FR-0710KL, Package=0603, Power (Watts)=0.1, Resistance (Ohms)=10000, Supplier Part Number 1=1995564, Tolerance (%)=1, Category=Resistor, ComponentLink1Description="Manufacturer Website", ComponentLink1URL=http://www.yageo.com, Supplier 1=Rs, Supplier 2=Farnell, Supplier 3=Digikey, Supplier 4=Digikey, Supplier 5=Mouser, Supplier 6=Newark, Supplier Part Number 2=9238549, Supplier Part Number 3=311-3.30KHRCT-ND, Supplier Part Number 4=311-3.30KHRDKR-ND, Supplier Part Number 5=603-RC0603FR-073K3L, Supplier Part Number 6=98K7393
R4: library part RC0603FR-0710KL, "RES 10K SM0603 YAGEO RC_L", Manufacturer=Yageo, Package=0603, Power (Watts)=0.1, Resistance (Ohms)=10000, Supplier Part Number 1=9238603, Tolerance (%)=1, Category=Resistor, ComponentLink1Description="Manufacturer Website", ComponentLink1URL=http://www.yageo.com, Manufacturer Part Number=RC0603FR-0710KL, Supplier 1=Farnell, Supplier 2="Future Electronics", Supplier 3=Rs, Supplier 4=Digikey, Supplier 5=Digikey, Supplier 6=Mouser, Supplier 7=Newark, Supplier Part Number 2=3349388, Supplier Part Number 3=1995443, Supplier Part Number 4=311-10.0KHRCT-ND, Supplier Part Number 5=311-10.0KHRDKR-ND, Supplier Part Number 6=603-RC0603FR-0710KL, Supplier Part Number 7=98K7338
R15 R17 R21 R23: library part RC0603FR-0710RL, "RES 10R SM0603 YAGEO RC_L", Manufacturer=Yageo, Package=0603, Power (Watts)=0.1, Resistance (Ohms)=10, Supplier Part Number 1=9238247, Tolerance (%)=1, Category=Resistor, ComponentLink1Description="Manufacturer Website", ComponentLink1URL=http://www.yageo.com, Manufacturer Part Number=RC0603FR-0710RL, Supplier 1=Farnell, Supplier 2=Digi-Key, Supplier Part Number 2=311-10.0HRCT-ND
R16 R22: library part MSMA2512R0200FGN, "RES SM0603YAGEO RC_L", Supplier Part Number 1=283-MSMA2512R0200FGNCT-ND, Supplier 1=Digi-Key, Supplier 2=Digi-Key, Supplier 3=Mouser, Supplier Part Number 2=283-MSMA2512R0200FGNDKR-ND, Supplier Part Number 3=504-MSMA2512R0200FGN
U1: library part TPS78433QWDRBRQ1, "TPS78433-Q1 3.3V, 300-mA, High-PSRR Low-Dropout Voltage Regulator With High Accuracy and Enable,  8-SON (3x3)", Supplier Part Number 1=595-TPS78433QWDRBRQ1, Supplier 1=Mouser, Supplier 2=Digikey, Supplier 3="Texas Instruments", Supplier 4=Digikey, Supplier 5=Digikey, Supplier 6=LCSC, Supplier Part Number 2=296-TPS78433QWDRBRQ1CT-ND, Supplier Part Number 3=TPS78433QWDRBRQ1, Supplier Part Number 4=296-TPS78433QWDRBRQ1DKR-ND, Supplier Part Number 5=296-TPS78433QWDRBRQ1TR-ND, Supplier Part Number 6=C3747465
U2 U3: "Proximity Sensors PROX SENS INTER VCSEL I2C-E4, IC SENSORS", Manufacturer_Name=Vishay, Mouser Part Number=78-VCNL36825T, Datasheet Link=https://www.vishay.com/docs/80235/vcnl36825t.pdf, Geometry.Height=0.6mm, Manufacturer_Part_Number=VCNL36825T, Mouser Price/Stock=https://www.mouser.co.uk/ProductDetail/Vishay-Semiconductors/VCNL36825T?qs=pUKx8fyJudAlmgCr9cmOAQ%3D%3D, Supplier 1=Mouser, Supplier 2=Digi-Key, Supplier 3=Digi-Key, Supplier Part Number 1=78-VCNL36825T, Supplier Part Number 2=751-VCNL36825TCT-ND, Supplier Part Number 3=751-VCNL36825TDKR-ND
U4: "4-Channel I2C And SMBus Switch With Reset Functions", Manufacturer_Name="Texas Instruments", Mouser Part Number=595-PCA9546ARGVR, Datasheet Link=http://www.ti.com/lit/gpn/pca9546a, Geometry.Height=1mm, Manufacturer_Part_Number=PCA9546ARGVR, Mouser Price/Stock=https://www.mouser.co.uk/ProductDetail/Texas-Instruments/PCA9546ARGVR?qs=iSMark9AYDVOIxSBd0ujBA%3D%3D, Supplier 1=Mouser, Supplier 2=Digi-Key, Supplier 3=Digi-Key, Supplier Part Number 1=595-PCA9546ARGVR, Supplier Part Number 2=296-21771-1-ND, Supplier Part Number 3=296-21771-6-ND
U5 U7: "Fully Integrated Proximity and Ambient Light Sensor with Infrared Emitter, I2C Interface, and Interrupt Function", Manufacturer_Name=Vishay, Mouser Part Number=78-VCNL4040M3OE, Datasheet Link=http://www.vishay.com/docs/84274/vcnl4040.pdf, Geometry.Height=1.15mm, Manufacturer_Part_Number=VCNL4040M3OE, Mouser Price/Stock=https://www.mouser.co.uk/ProductDetail/Vishay-Semiconductors/VCNL4040M3OE?qs=p1ya7m3AA0C%252Buyxak4%252Bv6g%3D%3D, Supplier 1=Mouser, Supplier 2=Digi-Key, Supplier 3=Digi-Key, Supplier Part Number 1=78-VCNL4040M3OE, Supplier Part Number 2=VCNL4040M3OECT-ND, Supplier Part Number 3=VCNL4040M3OEDKR-ND
U6: library part AS6221-AWLT-S, "AS6221 Temperature Sensor Digital -40°C ~ 125°C 16b 6-WLCSP (1.5x1.03)", Supplier Part Number 1=985-AS6221-AWLT-S, Supplier 1=Mouser, Supplier 2=Digikey, Supplier 3="Arrow Electronics", Supplier 4="Future Electronics", Supplier 5=Digikey, Supplier 6=Digikey, Supplier 7=Avnet, Supplier Part Number 2=4991-AS6221-AWLT-SCT-ND, Supplier Part Number 3=AS6221-AWLT-S, Supplier Part Number 4=1136541, Supplier Part Number 5=4991-AS6221-AWLT-SDKR-ND, Supplier Part Number 6=4991-AS6221-AWLT-STR-ND, Supplier Part Number 7=Q65114A1149
U8 U9: "Gate Drivers 85V Half Bridge MOSFET Driver", Manufacturer_Name=Microchip, Mouser Part Number=998-MIC4605-2YM-TR, Datasheet Link=http://www.microchip.com/mymicrochip/filehandler.aspx?ddocname=en579235, Geometry.Height=1.63mm, Manufacturer_Part_Number=MIC4605-2YM-TR, Mouser Price/Stock=https://www.mouser.co.uk/ProductDetail/Microchip-Technology/MIC4605-2YM-TR?qs=U6T8BxXiZAVl8W1xjIUxZQ%3D%3D, Supplier 1="Arrow Electronics", Supplier 2=Digi-Key, Supplier 3=Digi-Key, Supplier 4=Mouser, Supplier Part Number 1=MIC4605-2YM-TR, Supplier Part Number 2=576-4463-1-ND, Supplier Part Number 3=576-4463-6-ND, Supplier Part Number 4=998-MIC4605-2YM-TR

## Free pads (board coordinates)
  round 6.2 hole 3: M1(5,5) M1(5,85) M1(22,22) M1(22,68) M1(68,22) M1(68,68) M1(85,4.884) M1(85,85)

## Via types
v1: diameter 0.5, hole 0.3, Top to Bottom, 224 vias
v2: diameter 0.8, hole 0.4, Top to Bottom, 14 vias
v3: diameter 1.27, hole 0.711, Top to Bottom, 8 vias

## Nets (pads, with @x,y where several pads share a name; then routed paths per layer and width w, separated by ;. In a path a pad name is that pad's centre, name@x,y a point inside that pad or via, vN(x,y) a via of type N, cw(c..) or ccw(c..) an arc to the next point about the centre after c; other vN are vias at no path point)
3.3VA: C1.1 C9.1 C12.1 L1.2 U5.4 U7.4 | length 16.3
  Top w0.2: C12.1 40.273,30.858 40.796,30.335 40.796,29.394 41.415,28.776 U7.4
  Top w0.3: v2(38,30.935) 40.121,30.935 C12.1 ; v2(38,47.493) 40.121,47.493 C9.1 40.273,47.416 41.415,46.275 U5.4
  Top w0.75: C1.1 30.5,14.7 31.266,13.934 L1.2
  other v2: 32.5,13.934 34.4,13.934
3.3VD: C3.1 C4.1 C5.1 C6.1 C7.1 C8.1 C10.1 C11.1 L1.1 R2.1 R3.1 R4.1 R5.2 R6.2 R7.2 R8.2 R9.2 R10.2 R11.2 R12.2 U1.1 U2.4 U3.4 U4.14 U5.3 U6.B1 U7.3 | length 78.3
  Top w0.14: v1(56.696,24.081) 56.707,24.093 56.707,26.999 57.282,27.574 ; C10.1 57.282,28.747 57.282,27.574 ; U6.B1 57.282,27.574 ; 57.282,27.749 57.282,27.574
  Top w0.2: R10.2@35.823,42.109 35.823,44.233 35.823,45.173 35.97,45.321 v1(39.161,45.321) ; R12.2 35.87,25.55 35.87,27.677 R11.2 35.859,28.535 36.201,28.877 v1(39.161,28.877) ; U7.3 41.415,27.701 41.665,27.951 41.888,27.951 42.242,28.305 v1(42.311,28.305) 42.311,30.662 C11.1 ; U5.3 41.415,44.258 41.665,44.508 41.866,44.508 42.231,44.873 v1(42.279,44.873) 42.279,47.252 C8.1 ; U3.4 45.35,27.725 v1(45.927,27.148) C7.1 ; R4.1 57.073,16.35 57.323,16.1 60.83,16.1 v1(61.258,15.671) 61.258,13.987 60.564,13.292 C4.1@60.489,13.292
  Top w0.3: R9.2 R9.2@35.823,44.233 ; R10.2@35.823,42.109 R10.2 ; L1.1 37.353,13.866 U1.1 39.648,16.309 C3.1 39.79,17.654 40,17.865 v2(40,18) ; U2.4 45.35,44.225 v1(45.927,43.648) C6.1 ; R5.2 R6.2 ; R7.2 R8.2 ; U4.14 55.898,12.323 v2(56.873,12.323) 57.848,12.323 C5.1 59.672,12.475 C4.1 ; C4.1@60.489,13.292 C4.1 ; R2.1 R3.1 62.9,12.505 62.601,12.803 C4.1
  Bottom w0.75: v2(40,18) 50.587,18 56.255,12.333 56.863,12.333 v2(56.873,12.323)
  other v1: 48.877,17.807 48.285,36.969
GND: C2.2 C3.2 C4.2 C5.2 C6.2 C7.2 C8.2 C9.2 C10.2 C11.2 C12.2 C13.2 C14.2 C15.2 C17.2 C18.2 C19.2 C21.2 D1.2 D2.2 HDR1.12 HDR2.13 HDR2.14 HDR2.15 HDR3.4 J1.2 J3.2 J5.2 pad.M1 Q1.5 Q1.6 Q1.7 Q2.5 Q2.6 Q2.7 R1.1 R18.1 R24.1 U1.2 U1.3 U1.4 U1.5 U1.6 U2.2 U2.3 U3.2 U3.3 U4.6 U4.11 U4.15 U4.16 U4.17 U5.1 U6.A1 U6.A2 U6.B2 U7.1 U8.7 U9.7 | length 73.8
  Top w0.14: U6.B2 U6.A2 U6.A1 57.95,27.667 ; C10.2 57.95,27.667 ; v1(58.257,24.176) 58.257,26.999 57.95,27.307 57.95,27.667 ; HDR2.15 92.65,83.138 92.904,82.884 ; 92.904,82.883 v1(93.246,82.542) v1(93.246,82.542) 93.248,82.544 93.248,83.471 HDR2.13 ; HDR2.14 92.963,86.286 92.963,86.96 v1(92.976,86.973)
  Top w0.2: U7.1 v1(42.678,25.538) 43.94,25.538 C7.2 44.073,25.746 44.65,26.323 v1(44.65,26.671) U3.3 U3.2 ; U5.1 v1(42.706,42.096) 43.998,42.096 C6.2
  Top w0.254: C12.2 41.215,32.712 v2(41.503,33) 41.55,32.953 41.55,32.877 C11.2 ; C6.2 44.073,42.246 44.65,42.823 v1(44.65,43.171) U2.3 U2.2 ; v2(50.994,12.915) 50.999,12.92 52.145,12.92 U4.6 53.675,12.925 U4.17 ; U4.11 54.325,12.275 U4.17 ; U4.15 U4.17@54.325,12.925 ; C4.2 59.477,14.134 58.779,14.134 58.02,13.375 C5.2 57.848,13.527 v2(56.873,13.527) 55.898,13.527 U4.16 55.819,13.544 54.944,13.544 U4.17@54.325,12.925 ; U4.17 U4.17@54.325,12.925
  Top w0.3: v1(23.762,97.568) C14.2@24.675,97.568 ; U8.7 34.953,96.316 35.981,96.316 v1(36,96.298) ; R18.1 R18.1@34.9,87 ; R1.1 R1.1@37.647,11.5 ; v1(38.938,11.5) 38.957,11.5 39.373,11.916 U1.4 U1.3 ; v1(38.938,12.5) v1@38.971,12.533 ; C9.2 v2(41.415,49.27) 41.715,49.27 C8.2 ; v1(41.575,15.182) 41.575,15.236 41.644,15.304 C3.2 ; U1.6 U1.5 42.444,11.922 43.495,11.922 v1(43.5,11.927) 44.913,11.927 C2.2 ; D2.2 52.322,86.361 53.112,86.361 v2(53.392,86.641) R24.1 ; v1(52.871,97.658) 54.176,97.658 C18.2 ; U9.7 64.036,96.344 65.096,96.344 v1(65.105,96.353) ; Q1.6 R18.1@34.62,86.72 ; Q1.6 Q1.7 34.53,87.37 R18.1@34.9,87 ; Q1.6 Q1.5 33.97,86.07 R18.1@34.62,86.72 ; R18.1@34.62,86.72 R18.1@34.9,87 ; v1@38.971,12.533 38.996,12.557 38.996,12.839 39.373,13.216 U1.2 U1.3 ; v1@38.971,12.533 39.615,12.533 U1.3
  Top w0.5: R1.1@37.647,11.5 v1(38.938,11.5)
  Top w1: v3(19.939,74) C17.2 ; C14.2@24.675,97.568 C14.2 ; C15.2 26.239,86.593 26.239,85.727 26.516,85.45 v3(26.516,85.377) ; v3(45,69.85) C13.2 ; v3(58,88.213) 59.127,88.213 C19.2 ; v3(69.758,74.5) 69.775,74.517 C21.2
  other v1: 10.414,2.554 15.414,2.554 20.414,2.554 25.414,2.554 30.414,2.554 35.414,2.554 40.414,2.554 45.414,2.554 50.414,2.554 55.414,2.554 60.414,2.554 65.414,2.554 70.414,2.554 75.414,2.554 80.414,2.554 90.414,2.554 95.414,2.554 10.414,7.554 15.414,7.554 20.414,7.554 25.414,7.554 30.414,7.554 35.414,7.554 40.414,7.554 45.414,7.554 50.414,7.554 55.414,7.554 60.414,7.554 65.414,7.554 70.414,7.554 75.414,7.554 80.414,7.554 90.414,7.554 95.414,7.554 5.414,12.554 10.414,12.554 15.414,12.554 20.414,12.554 25.414,12.554 5.414,17.554 10.414,17.554 15.414,17.554 20.414,17.554 25.414,17.554 35.414,17.554 60.414,17.554 65.414,17.554 70.414,17.554 75.414,17.554 80.414,17.554 85.414,17.554 30.414,22.554 45.414,22.554 55.414,22.554 60.414,22.554 75.414,22.554 80.414,22.554 85.414,22.554 20.414,27.554 25.414,27.554 30.414,27.554 65.414,27.554 70.414,27.554 75.414,27.554 80.414,27.554 85.414,27.554 90.414,27.554 20.414,32.554 25.414,32.554 30.414,32.554 45.414,32.554 70.414,32.554 75.414,32.554 80.414,32.554 85.414,32.554 90.414,32.554 20.414,37.554 25.414,37.554 30.414,37.554 35.414,37.554 40.414,37.554 70.414,37.554 75.414,37.554 80.414,37.554 85.414,37.554 90.414,37.554 20.414,42.554 25.414,42.554 30.414,42.554 70.414,42.554 75.414,42.554 85.414,42.554 90.414,42.554 20.414,47.554 25.414,47.554 30.414,47.554 35.414,47.554 45.414,47.554 70.414,47.554 75.414,47.554 85.414,47.554 90.414,47.554 20.414,52.554 25.414,52.554 30.414,52.554 35.414,52.554 40.414,52.554 45.414,52.554 70.414,52.554 75.414,52.554 85.414,52.554 90.414,52.554 20.414,57.554 25.414,57.554 30.414,57.554 35.414,57.554 40.414,57.554 45.414,57.554 75.414,57.554 85.414,57.554 90.414,57.554 20.414,62.554 25.414,62.554 30.414,62.554 35.414,62.554 40.414,62.554 45.414,62.554 70.414,62.554 75.414,62.554 85.414,62.554 90.414,62.554 30.414,67.554 35.414,67.554 75.414,67.554 85.414,67.554 90.414,67.554 5.414,72.554 10.414,72.554 15.414,72.554 20.414,72.554 25.414,72.554 30.414,72.554 35.414,72.554 40.414,72.554 50.414,72.554 55.414,72.554 60.414,72.554 65.414,72.554 70.414,72.554 75.414,72.554 85.414,72.554 90.414,72.554 5.414,77.554 10.414,77.554 15.414,77.554 30.414,77.554 40.414,77.554 55.414,77.554 65.414,77.554 75.414,77.554 85.414,77.554 90.414,77.554 10.414,82.554 15.414,82.554 30.414,82.554 35.414,82.554 50.414,82.554 55.414,82.554 60.414,82.554 65.414,82.554 75.414,82.554 90.414,82.554 10.414,87.554 15.414,87.554 50.414,87.554 65.414,87.554 75.414,87.554 5.414,92.554 10.414,92.554 15.414,92.554 35.414,92.554 40.414,92.554 45.414,92.554 50.414,92.554 65.414,92.554 70.414,92.554 80.414,92.554 85.414,92.554
NetC1_2: C1.2 R1.2 | length 5.9
  Top w0.75: C1.2 34.487,10.35 R1.2
NetC16_1: C16.1 R14.2 | length 2.3
  Top w0.2: R14.2 25.789,95.4 C16.1
NetC16_2: C16.2 D1.1 Q1.9 R13.1 R16.2 R18.2 U8.4 | length 24.4
  Top w0.3: C16.2 27.415,93.078 28.794,93.078 ; U8.4 28.794,93.078 ; Q1.9 32.134,89.313 30.49,90.957 29.043,90.957 28.794,91.206 28.794,93.078
  Top w1: Q1.9 32.152,87.027 32.152,85.992 32.161,85.982 32.161,85.555 32.716,85 34.654,85 R18.2 35.546,85.892 36.975,85.892 D1.1 37.025,85.892 38.36,85.892 R13.1 39.075,85.313 39.804,86.042 41.179,86.042 42.429,87.292 R16.2
NetC17_1: C17.1 J3.1 L2.2 | length 22.6
  Top w1: J3.1 19.939,92.7 C17.1 19.939,81.2 24.039,77.1 L2.2
NetC20_1: C20.1 R20.2 | length 2.2
  Top w0.3: R20.2 54.579,93.35 C20.1
NetC20_2: C20.2 D2.1 Q2.9 R19.1 R22.2 R24.2 U9.4 | length 31.5
  Top w0.3: C20.2 56.483,92.9 57.107,92.9 57.5,92.507 ; U9.4 58.191,93.795 57.5,93.104 57.5,92.507 ; Q2.9 62.922,87.243 62.922,88.139 60.469,90.593 58.476,90.593 57.5,91.568 57.5,92.507
  Top w1: R22.2 47.5,87.292 48.75,86.042 49.37,86.042 50.162,85.25 D2.1 52.287,85.225 54.362,85.225 R24.2@54.6,84.987 ; R24.2 R19.1 56.65,84.836 62.643,84.836 63.272,85.466 63.272,86.857 Q2.9
NetC21_1: C21.1 J5.1 L3.2 | length 25.3
  Top w1: L3.2 62.4,78.15 63.45,79.2 67.456,79.2 69.775,81.519 C21.1 69.775,87.433 J5.1
NetJ2_1: J2.1 U8.6 | length 34.9
  Top w0.2: J2.1 20.762,96.298 23.193,98.729 36.221,98.729 37.167,97.782 37.167,96.095 36.137,95.065 U8.6
NetJ4_1: J4.1 U9.6 | length 19.8
  Top w0.2: U9.6 68.41,95.065 71.188,97.843 80.474,97.843 J4.1
NetL2_1: L2.1 R16.1 | length 9.6
  Top w1: L2.1@37.164,75.95 L2.1 37.164,78.25 38.339,79.425 38.712,79.425 42.429,83.142 R16.1
NetL3_1: L3.1 R22.1 | length 8.2
  Top w1: R22.1 47.5,83.142 51.442,79.2 51.45,79.2 52.5,78.15 L3.1
NetQ1_1: Q1.1 R15.2 | length 2.3
  Top w0.3: R15.2 30.114,90.13 30.314,89.93 Q1.1
NetQ1_8: Q1.8 R17.2 | length 2.2
  Top w0.3: R17.2 33.086,90.087 Q1.8
NetQ2_1: Q2.1 R21.2 | length 3.5
  Top w0.3: R21.2 59.001,89.764 60.03,89.764 61.395,88.399 61.395,87.925 Q2.1
NetQ2_8: Q2.8 R23.2 | length 2.4
  Top w0.3: R23.2 63.365,89.789 64.242,88.911 Q2.8
NetR4_2: R4.2 U4.1 | length 2.2
  Top w0.2: U4.1 54.975,14.8 55.419,15.244 R4.2
NetR5_1: R5.1 U2.5 U4.3 | length 34.9
  Top w0.2: U2.5 45.35,44.95 45.45,44.85 45.649,44.85 46.877,43.622 46.877,40.96 45.981,40.064 45.981,36.712 46.631,36.062 R5.1 46.631,28.866 53.675,21.822 U4.3
NetR6_1: R6.1 U2.6 U4.2 | length 35.6
  Top w0.2: U2.6 45.35,45.675 45.45,45.575 45.649,45.575 47.204,44.02 47.204,38.649 46.631,38.076 R6.1 46.631,37.208 47.458,36.381 47.458,28.933 54.325,22.067 U4.2
NetR7_1: R7.1 U3.5 U4.5 | length 18.1
  Top w0.2: U3.5 45.35,28.45 45.45,28.35 45.649,28.35 49.704,24.295 49.704,17.727 50.531,16.9 R7.1 50.531,14.844 51.8,13.575 U4.5
NetR8_1: R8.1 U3.6 U4.4 | length 18.1
  Top w0.2: U3.6 45.35,29.175 45.45,29.075 45.649,29.075 50.531,24.193 R8.1 50.531,18.024 53.025,15.53 U4.4
NetR9_1: R9.1 U4.9 U5.7 | length 48.3
  Top w0.2: R9.1 R9.1@37.464,44.146 ; U5.7 38.539,43.171 37.814,43.896 37.714,43.896 R9.1@37.464,44.146 ; U4.9 50.155,10.75 41.708,19.197 39.736,19.197 34.4,24.533 34.4,30.735 36.663,32.998 36.663,43.345 R9.1@37.464,44.146
NetR10_1: R10.1 U4.10 U5.8 | length 48.1
  Top w0.2: U5.8 R10.1 37.49,32.93 35,30.44 35,24.58 39.857,19.724 42.087,19.724 v1(47.827,13.984) ; v1(47.827,12.073) 50.4,9.5 53.307,9.5 53.675,9.868 U4.10
  Bottom w0.2: v1(47.827,12.073) v1(47.827,13.984)
NetR11_1: R11.1 U4.7 U7.7 | length 27.6
  Top w0.2: U7.7 39.879,26.748 39.284,26.748 38.344,27.688 R11.1 37.513,27.588 36.709,26.784 36.709,26.391 36.709,24.962 37.171,24.5 38.6,24.5 48.5,14.6 48.5,13.265 49.604,12.161 51.307,12.161 51.421,12.275 U4.7
NetR12_1: R12.1 U4.8 U7.8 | length 22.9
  Top w0.2: R12.1 38.494,25.538 ; U7.8 38.494,25.538 ; v1(49.704,13.065) 49.704,14.328 38.494,25.538 ; v1(50.825,11.557) 50.859,11.591 52.116,11.591 U4.8
  Bottom w0.254: v1(49.704,13.065) 49.704,12.677 v1(50.825,11.557)
NetR14_1: R14.1 U8.2 | length 2.5
  Top w0.2: R14.1 28.263,95.5 29.098,96.335 U8.2
NetR15_1: R15.1 U8.3 | length 5
  Top w0.2: U8.3 30.564,95.065 31,94.629 31,92.678 30.122,91.8 R15.1@30.022,91.8
NetR17_1: R17.1 U8.8 | length 6.8
  Top w0.2: R17.1@33,91.8 33,96.083 34.522,97.605 U8.8
NetR20_1: R20.1 U9.2 | length 2.7
  Top w0.3: R20.1 56.291,95.485 56.858,95.485 57.581,96.209 58.477,96.209 U9.2
NetR21_1: R21.1 U9.3 | length 5.2
  Top w0.3: U9.3 58.803,94.865 59.635,94.865 60,94.5 60,93 59.3,92.3 59.3,91.62 59.1,91.42 R21.1
NetR23_1: R23.1 U9.8 | length 7.7
  Top w0.3: R23.1 63.165,91.443 62.965,91.643 62.965,91.743 62.5,92.208 62.5,97.016 62.889,97.405 63.827,97.405 U9.8
NetU5_2: U5.2 U5.5 | length 2.8
  Top w0.14: U5.5 40.015,45.308 40.295,45.028 40.327,45.028 40.715,44.64 40.715,43.851 40.953,43.613 40.985,43.613 41.415,43.183 U5.2
NetU7_2: U7.2 U7.5 | length 2.8
  Top w0.14: U7.5 40.015,28.751 40.295,28.471 40.327,28.471 40.715,28.082 40.715,27.294 40.953,27.056 40.985,27.056 41.415,26.626 U7.2
OSC_OUT: HDR1.2 HDR2.1 HDR3.6 | length 85.3
  Top w0.14: HDR3.6 94.944,94.802 94.944,89.88 97.85,86.974 97.85,85.826 96.85,84.826 HDR2.1 96.85,81.729 96.906,81.673
  Top w0.3: HDR1.2 97.313,17.693 97.313,80.81 96.906,81.217 96.906,81.673
PwmBuck1: HDR1.7 J2.2 U8.5 | length 146.4
  Top w0.2: J2.2 11.931,93.758 14.281,91.407 v1(16.539,91.407) ; v1(27.016,83.35) 31.7,78.666 31.7,72.676 37.663,66.713 62.4,66.713 72.5,56.613 72.5,37.5 85.42,24.58 HDR1.7 ; 33.738,93.011 U8.5@34.522,93.795
  Top w0.3: v1(33.7,92.678) 33.738,92.716 33.738,93.011 ; U8.5@34.522,93.795 U8.5
  Bottom w0.2: v1(27.016,83.35) 24.596,83.35 v1(16.539,91.407) 32.43,91.407 v1(33.7,92.678)
PwmBuck2: HDR1.8 J4.2 U9.5 | length 98.2
  Top w0.2: U9.5 68.277,93.795 71.498,97.016 78.761,97.016 J4.2 82,88.776 80.946,87.722 80.946,38.554 92.756,26.744 92.756,23.296 HDR1.8
SCL_B: HDR1.10 R2.2 U4.12 U6.A3 | length 59.2
  Top w0.14: U6.A3 57.682,23.122 67.889,12.915 v1(68.176,12.915)
  Top w0.2: U4.12 59,10.75 59.775,9.975 64.194,9.975 64.87,10.65 65.3,10.65 R2.2 67.926,10.851 v1(69.103,12.028) 70,12.925 87.465,12.925 HDR1.10
  Bottom w0.2: v1(68.176,12.915) 68.196,12.915 69.083,12.028 v1(69.103,12.028)
SCL_FMAIN: HDR1.3 HDR2.3 HDR3.7 | length 83.5
  Top w0.14: HDR3.7 91.281,96.028 92.595,94.714 92.595,91.669 97.52,86.744 97.52,85.963 96.25,84.693 HDR2.3 96.259,83.464 96.259,81.673
  Top w0.3: HDR1.3 96.666,19.586 96.666,80.842 96.259,81.249 96.259,81.673
SCL_FSEC: HDR1.6 HDR2.11 HDR3.1 | length 72.1
  Top w0.14: HDR3.1 88.639,87.401 91.627,84.413 93.245,84.413 93.85,83.808 HDR2.11 93.85,81.673
  Top w0.3: 93.85,81.673 93.85,81.223 94.04,81.033 94.04,80.81 HDR1.6
SDA_B: HDR1.9 R3.2 U4.13 U6.B3 | length 58.7
  Top w0.14: U6.B3 57.282,22.955 68.177,12.061
  Top w0.2: U4.13 56.2,11.625 56.248,11.577 56.248,11.49 56.397,11.341 62.409,11.341 62.9,10.851 R3.2 64.161,10.851 65.084,11.774 67.889,11.774 68.177,12.061 69.64,13.524 85.524,13.524 HDR1.9
SDA_FMAIN: HDR1.4 HDR2.5 HDR3.2 | length 77.6
  Top w0.14: HDR3.2 91.179,86.85 92.777,85.252 94.206,85.252 95.65,83.808 HDR2.5 95.65,81.687
  Top w0.3: HDR1.4 95.95,21.41 95.95,80.81 95.65,81.11 95.65,81.687
SDA_FSEC: HDR1.5 HDR2.9 HDR3.8 | length 78
  Top w0.14: HDR3.8 88.692,96.028 89.91,94.809 89.91,87.146 92.314,84.743 93.515,84.743 94.45,83.808 HDR2.9 94.464,83.459 94.464,81.59 94.464,81.519
  Top w0.3: HDR1.5 95.244,23.244 95.244,80.81 94.464,81.59
VIN: C2.1 HDR1.1 HDR2.6 HDR2.7 HDR2.8 HDR3.5 U1.7 U1.8 | length 6.6
  Top w0.14: HDR2.8 94.767,86.29 94.767,86.867 v1@95.038,87.137 ; v1(95.038,87.235) 95.038,87.161 95.35,86.848 HDR2.6 ; HDR2.7 95.057,83.466 95.057,82.68 v1(95.063,82.673)
  Top w0.3: U1.7 42.463,13.241 42.815,13.241 v2@43.384,13.811 ; U1.8 42.463,13.841 43.47,13.841 v2(43.5,13.811) C2.1
Vpower: C13.1 C14.1 C15.1 C18.1 C19.1 J1.1 Q1.2 Q1.3 Q1.4 Q1.10 Q2.2 Q2.3 Q2.4 Q2.10 R13.2 R19.2 U8.1 U9.1 | length 60.6
  Top w0.3: C15.1 27.943,86.818 24.739,90.022 24.739,95.845 25.323,96.429 25.841,96.429 26.093,96.681 26.093,97.004 26.693,97.605 U8.1 ; J1.1 51.798,94.5 53.802,96.504 55.057,96.504 56.083,97.53 C18.1 U9.1
  Top w0.75: v3(28.5,85.45) 28.5,85.59 28.218,85.873 28.218,86.468 C15.1 28.218,86.743 30.222,86.743 30.722,86.243 ; Q1.3 30.722,87.129 30.722,87.166 Q1.10@30.825,87.268 ; C19.1 61.193,86.186 61.881,86.875
  Top w1: R13.2 39.363,87.391 v2(39.804,87.391) v2(39.804,88.399) ; C13.1 v3(45,80) ; R19.2 56.804,86.336 59.15,86.336 C19.1
  Bottom w1: v2(39.804,87.391) v2(39.804,88.399) ; v3(45,80) 47.789,82.789 J1.1
  other v3: 57.84,86.475
pads on no net: Credit. HDR1.11 HDR2.2 HDR2.4 HDR2.10 HDR2.12 HDR3.3 U1.9 U2.1 U3.1 U5.6 U7.6

## Polygon pours and split planes (outlines as drawn)
GND on Mid1 "GND_L02_P016" (solid, pour order 16): 0,0 100,0 100,100 -0.5,100
GND on Mid2 "GND_L03_P001" (solid, pour order 1): 0,0 100,0 100,100 -0.5,100
Vpower on Bottom "VPOWER_L04_P000" (solid, remove dead copper, pour order 0): 46.1,95.483 46.1,87.743 27.016,87.743 27.016,77.962 58.575,77.962 58.575,87.292 51.06,87.292 51.06,95.483 51.562,95.483
GND on Bottom "GND_L04_P007" (solid, remove dead copper, pour order 7): 0,0 100,0 100,100 -0.5,100
3.3VD on Bottom "3.3VD_L04_P005" (solid, remove dead copper, pour order 5): 65.024,15.483 65.024,65 38.939,65 38.939,15.45
3.3VA on Bottom "3.3VA_L04_P004" (solid, pour order 4): 38.5,0.5 38.5,65 25,65 25,0.5
VIN on Bottom "VIN_L04_P003" (solid, pour order 3): 38.938,14.982 38.938,0 100,0 100,100 85,100 85,14.88
GND on Top "GND_L01_P015" (solid, remove dead copper, pour order 15): 0,0 100,0 100,100 -0.5,100
NetC20_2 on Top "NETC20_2_L01_P014" (solid, pour order 14): 48.9,88.937 51.562,85.481 62.338,85.225 63.744,85.225 63.335,83 52.061,83 48.9,85.69
NetC21_1 on Top "NETC21_1_L01_P013" (solid, pour order 13): 61.937,80.189 75.5,96.028 78.28,96.028 78.28,79.982 69.439,79.982 64.09,75.015 61.937,75.015
NetL3_1 on Top "NETL3_1_L01_P012" (solid, pour order 12): 46.13,81.569 51.564,76.578 55.048,78.993 48.655,84.407
NetC17_1 on Top "NETC17_1_L01_P011" (solid, pour order 11): 27.942,80.024 19.815,95.863 16.698,95.863 16.698,79.817 20.439,79.817 25.789,74.85 27.942,74.85
NetL2_1 on Top "NETL2_1_L01_P008" (solid, pour order 8): 40.958,84.537 35.967,79.103 38.382,75.619 43.796,82.012
NetC16_2 on Top "NETC16_2_L01_P006" (solid, pour order 6): 31.7,85.521 31.7,83.738 39.163,83.738 41,85.575 41,86.72 38,85.466

## Other copper
Multi-Layer:
  pour cut-out: 56,30 58.991,30 58.991,24.65 55.989,24.65

## Silkscreen, mask and mechanical layers (free items; w line width, h text height)
Top Overlay: